# Altium PCB Smart_Podium.PcbDoc (part 1 of 3)
Units mm, origin at the board's own origin, x right, y up, seen from the top; angles counter-clockwise.
Board outline 100 x 100 mm, 4 copper layers (Top Layer, Inner Layer 1 (GND), Inner Layer 2 (GND), Bottom Layer), stack 1.57 mm thick; 107 components, 94 nets, 341 pads, 455 vias.
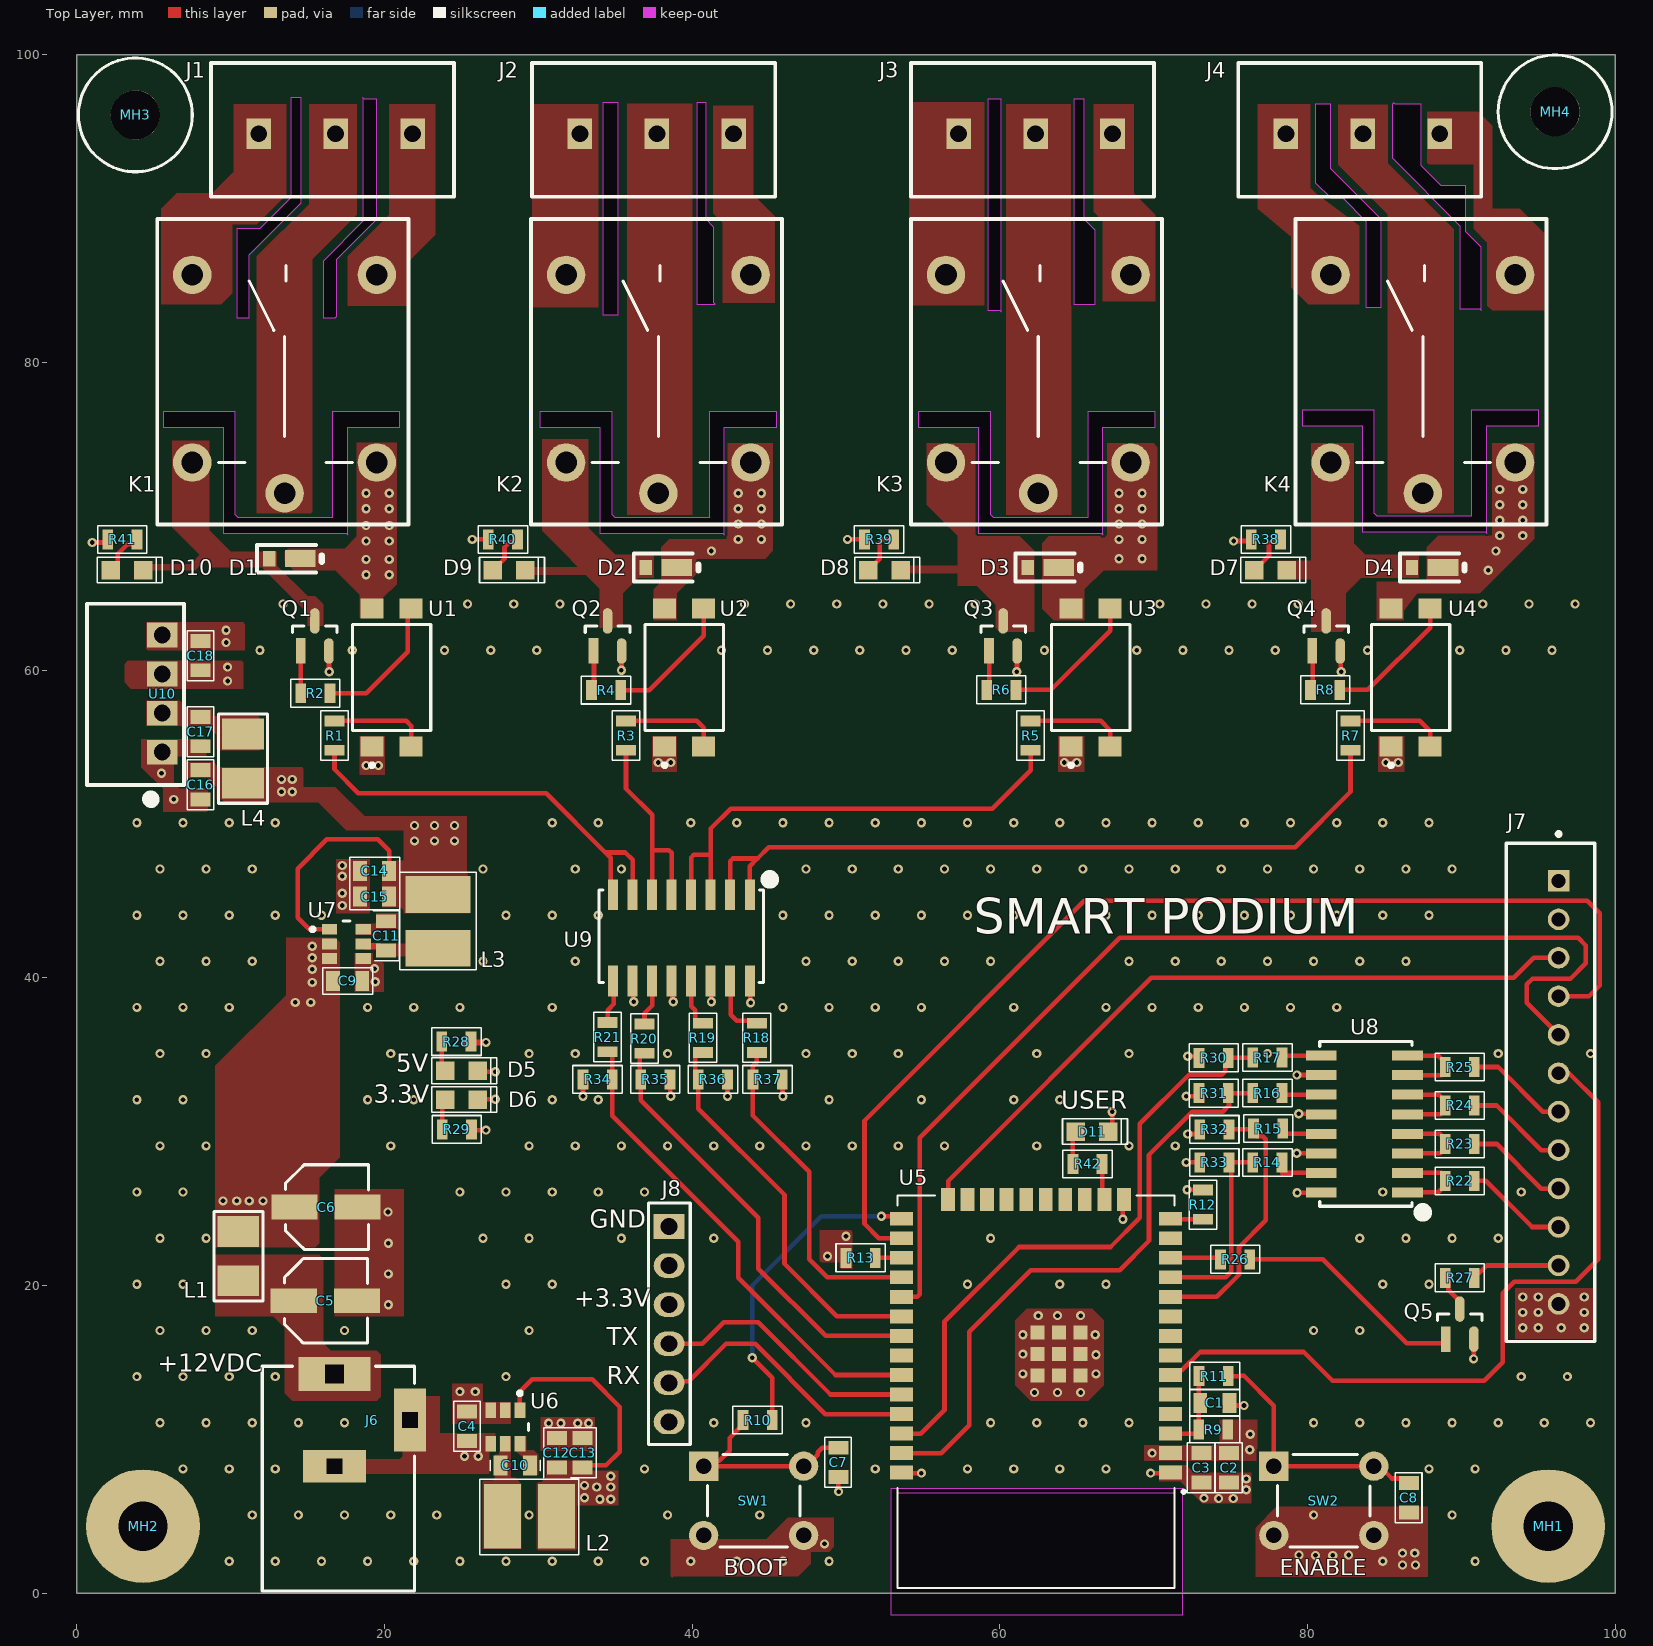
[diagram p0: Top Layer view]
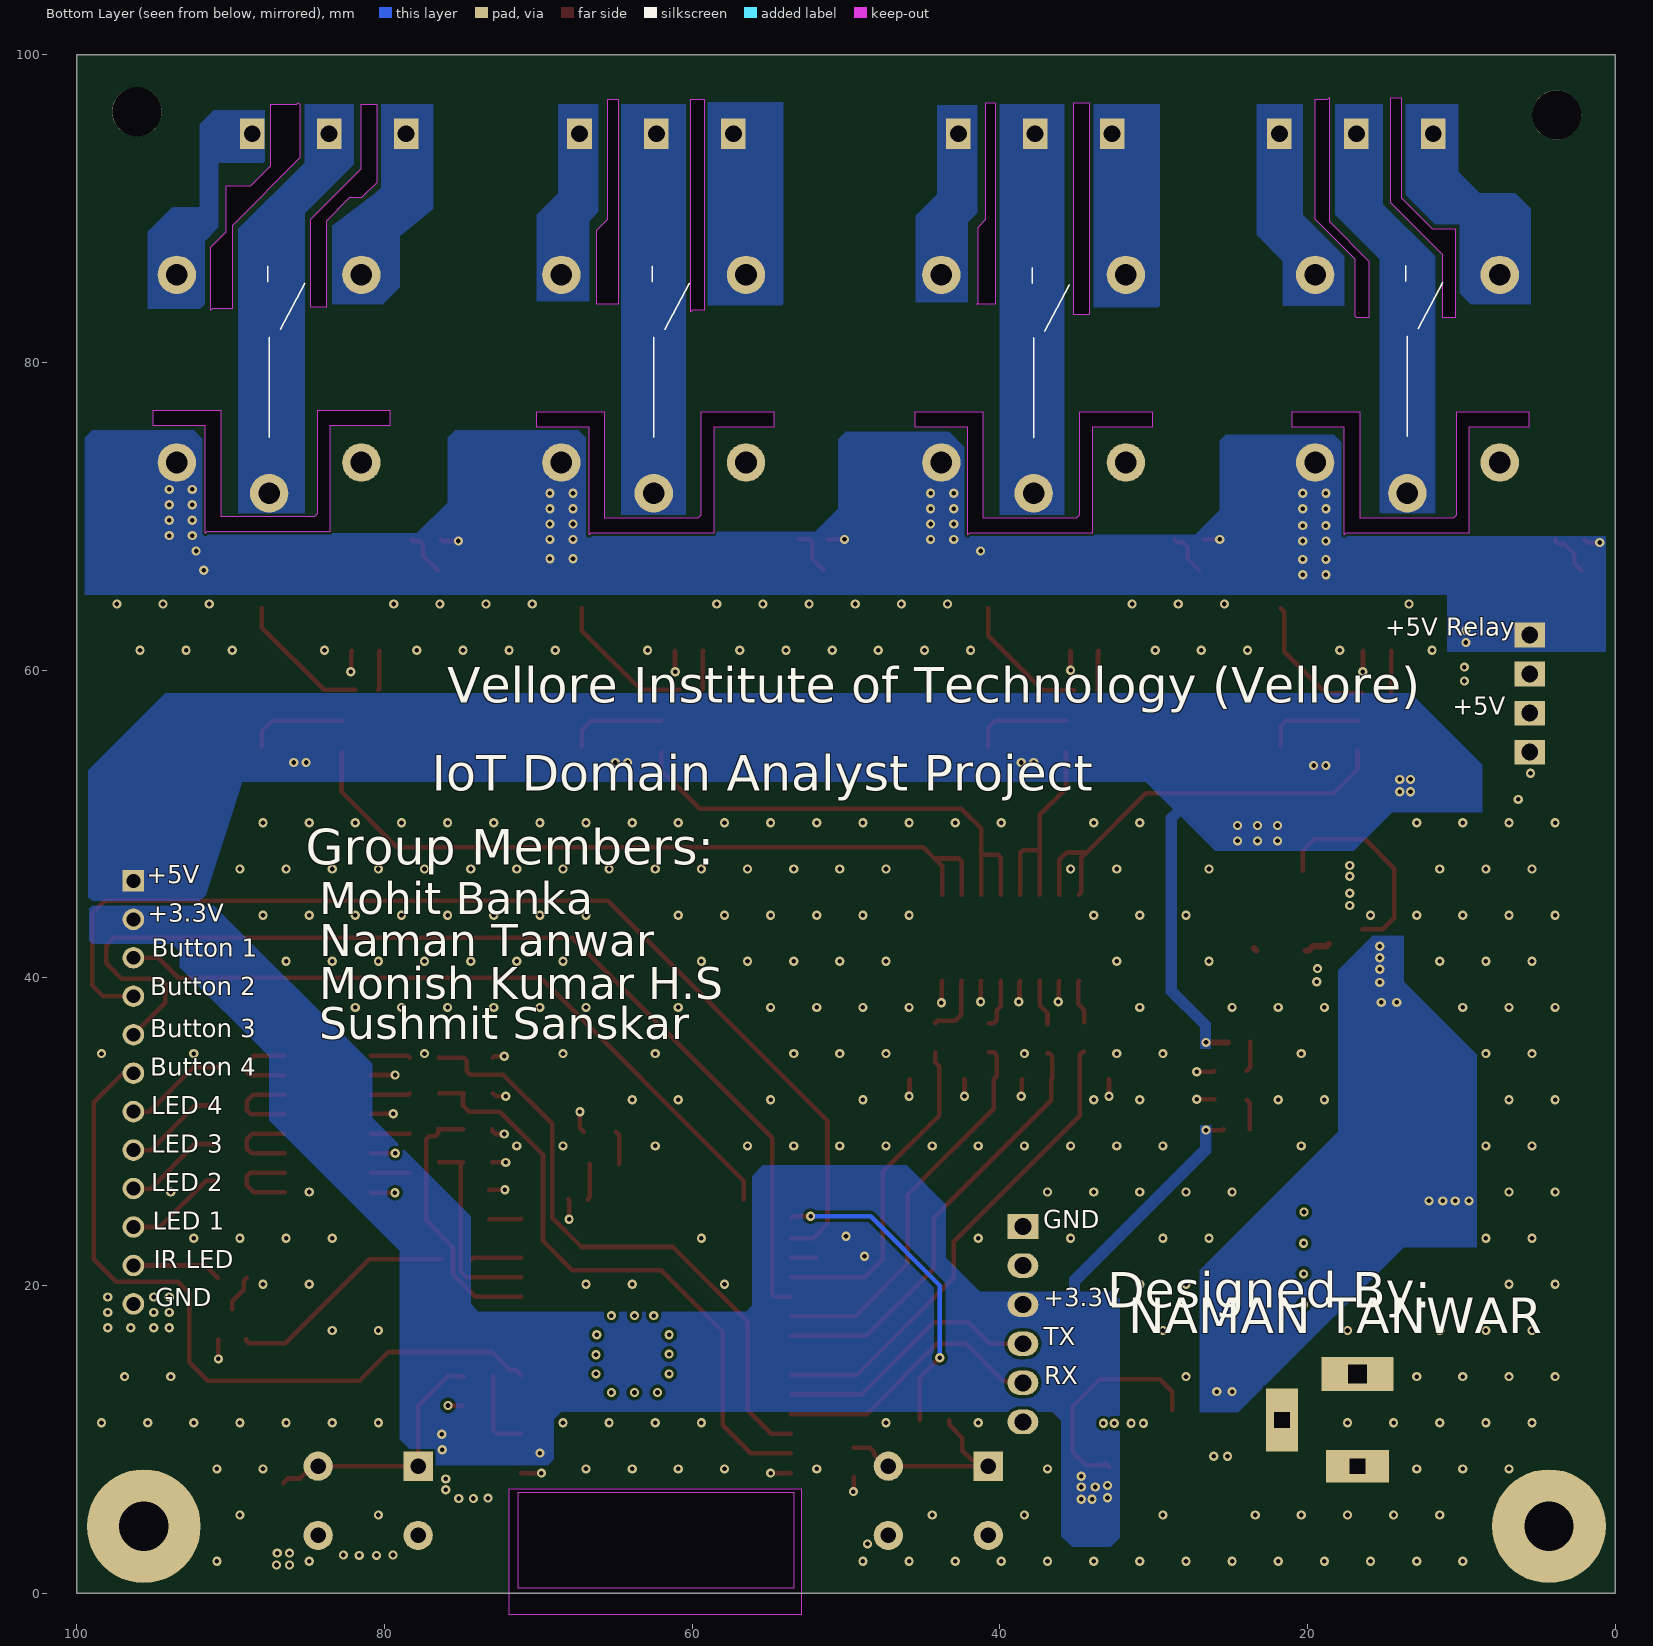
[diagram p1: Bottom Layer view, seen from below]
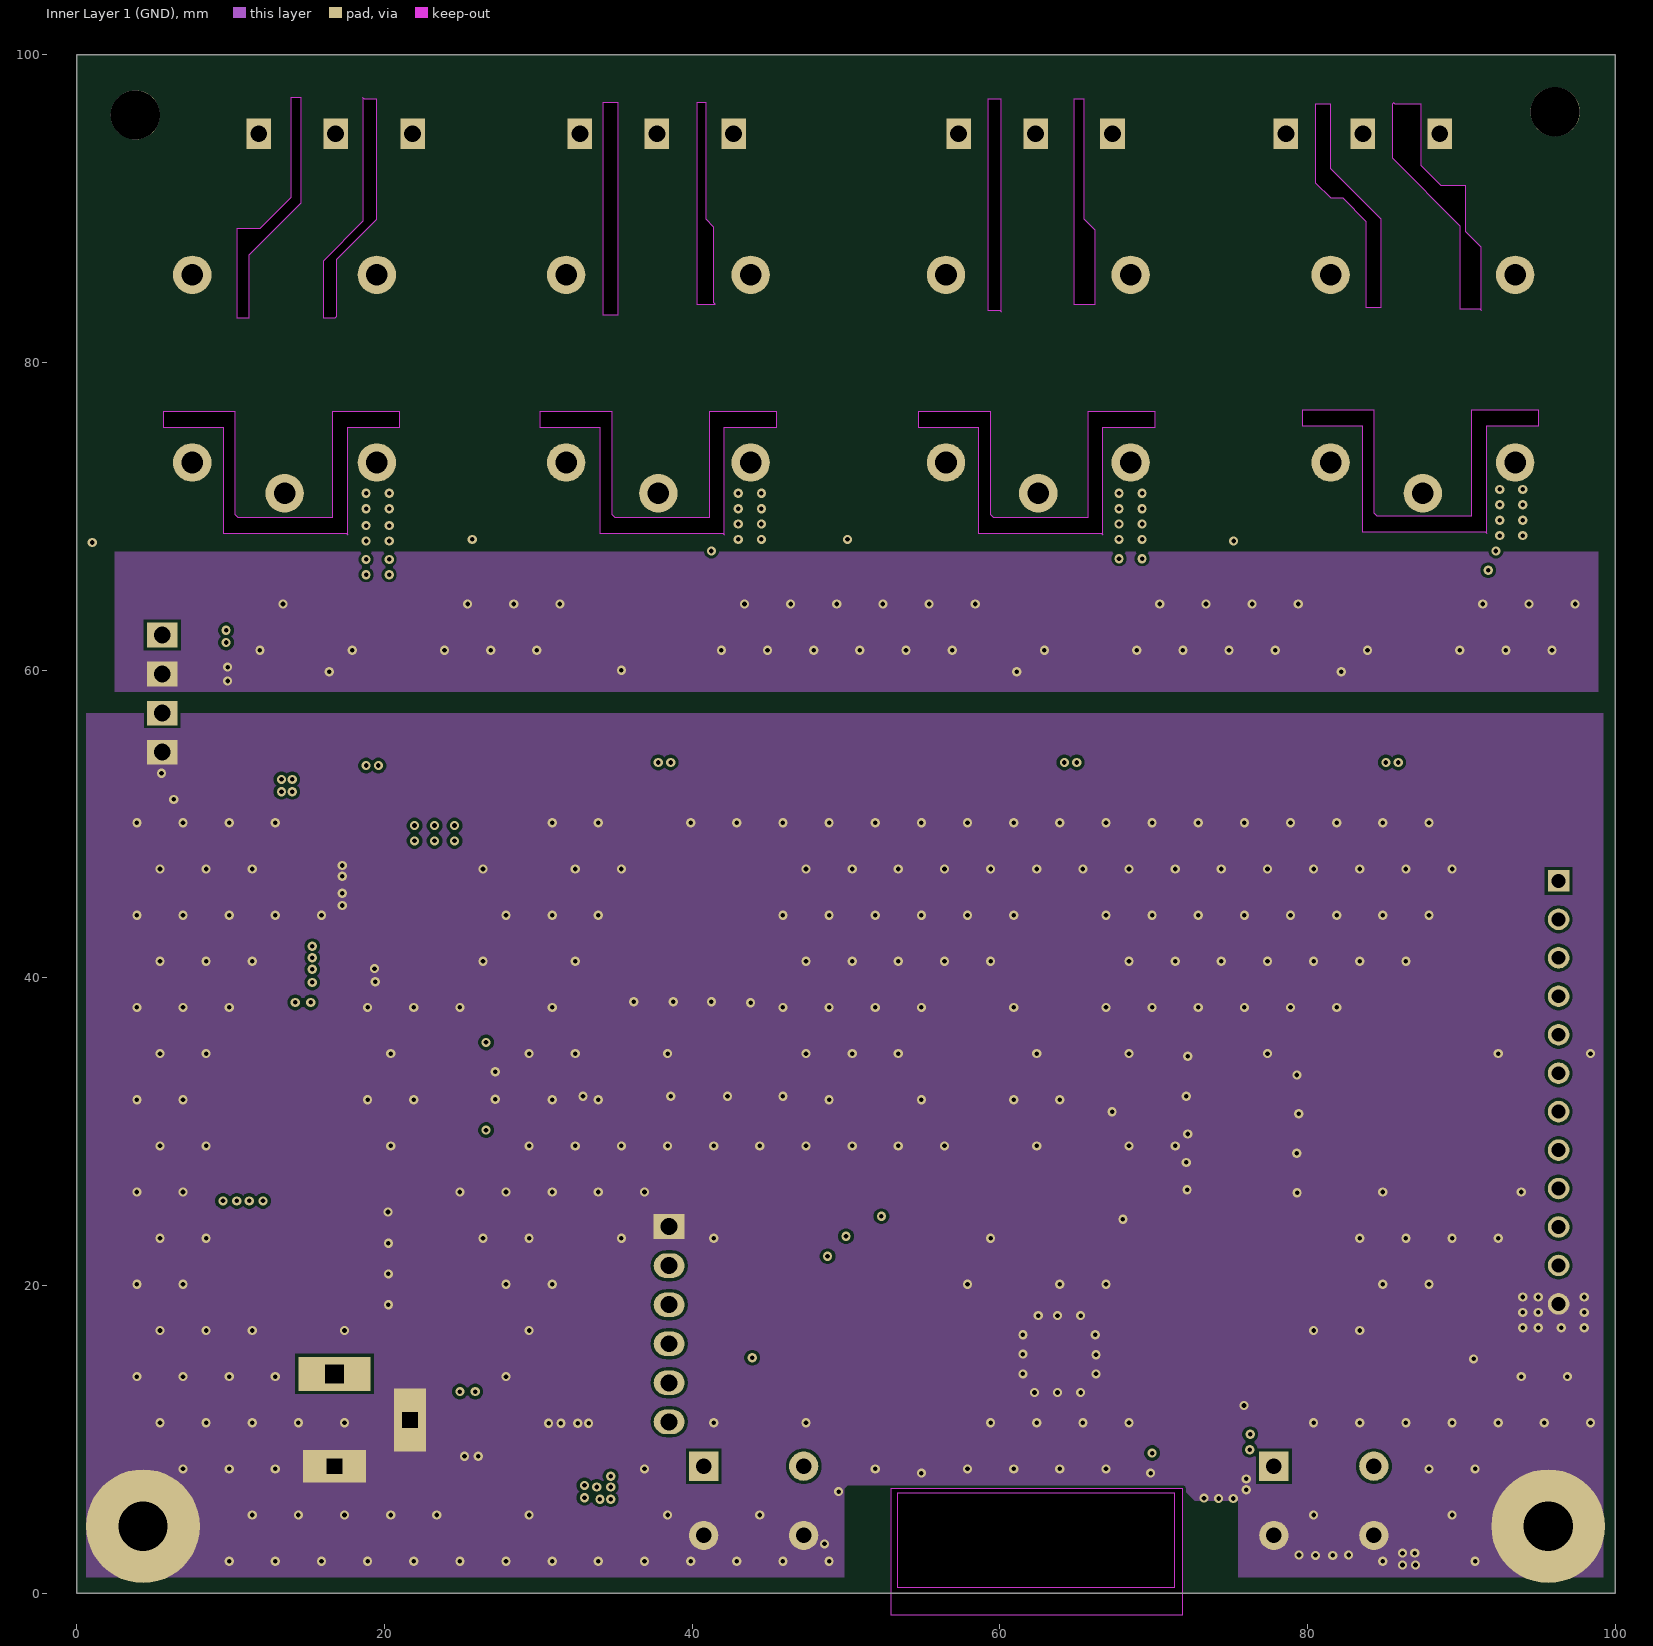
[diagram p2: Inner Layer 1 (GND)]
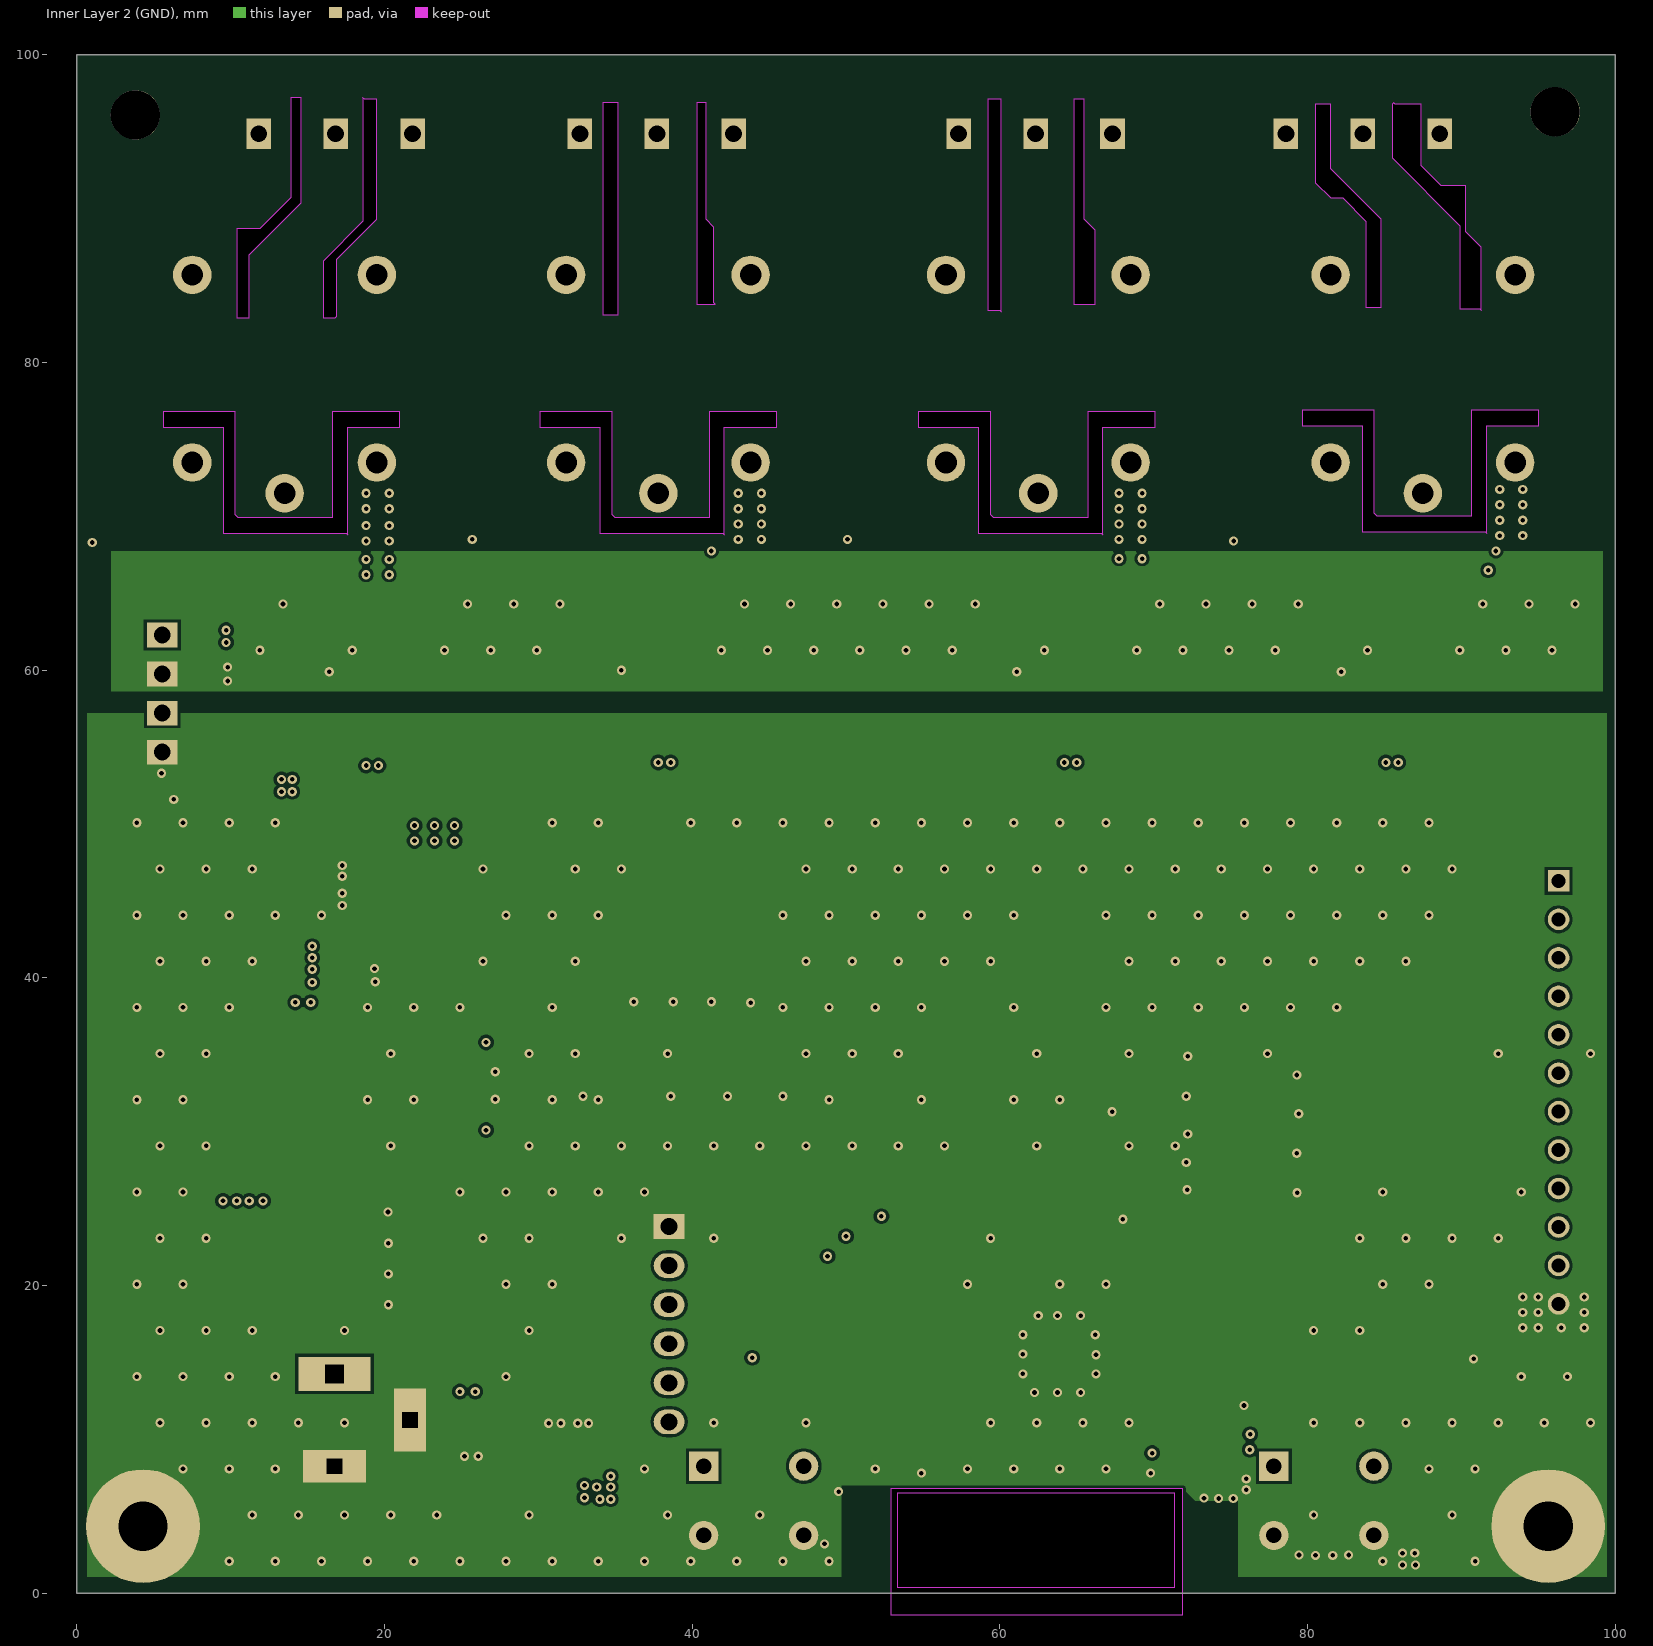
[diagram p3: Inner Layer 2 (GND)]
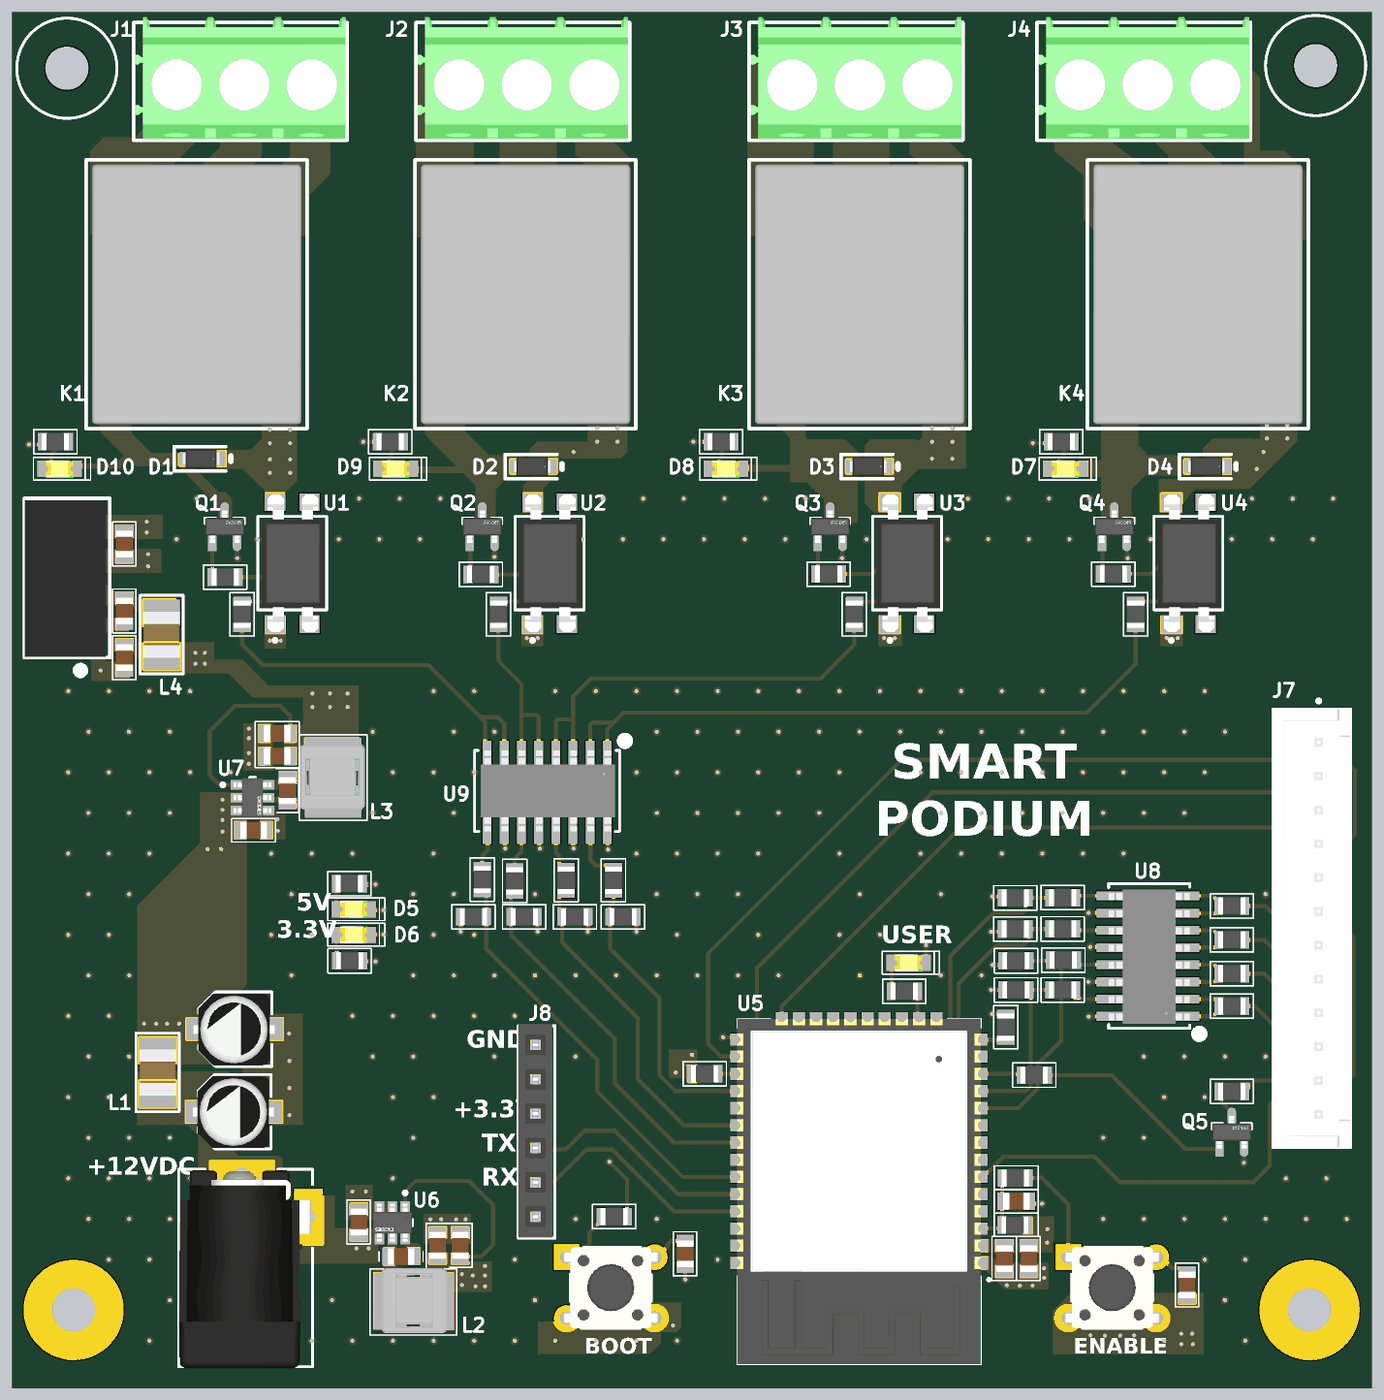
[diagram p5: 3D render of the assembled board from above, using the file's embedded part models]

## Layer stack, top to bottom
Top Solder: solder mask 0.0102, Solder Resist, Dk 3.5
Top Layer: signal copper 0.035
Dielectric 2: prepreg 0.2, PP-006, Dk 4.1
Inner Layer 1 (GND): signal copper 0.0175
Dielectric 1: dielectric 1.065, FR-4, Dk 4.8
Inner Layer 2 (GND): signal copper 0.0175
Dielectric 3: prepreg 0.2, PP-006, Dk 4.1
Bottom Layer: signal copper 0.035
Bottom Solder: solder mask 0.0102, Solder Resist, Dk 3.5

## Board outline
0,0 0,100 100,100 100,0
cut-out: 52.9,6.8 52.9,-1.4 71.9,-1.4 71.9,6.8
cut-out: 85.5,96.8 85.5,93.3 89.9,88.9 89.9,83.5 91.2,83.5 91.3,83.4 91.3,87.5 90.3,88.5 90.3,91.5 88.7,91.5 87.4,92.8 87.4,96.8 85.7,96.8 85.6,96.9
cut-out: 80.5,96.8 80.5,91.7 81.5,90.7 82.3,90.7 83.8,89.2 83.8,83.6 84.8,83.6 84.8,89.3 81.5,92.6 81.5,96.8
cut-out: 64.8,83.8 66.2,83.8 66.2,88.6 65.5,89.3 65.5,97.1 64.8,97.1
cut-out: 59.2,97.1 59.2,83.4 60,83.4 60.1,83.3 60.1,97.1
cut-out: 40.3,96.9 40.3,83.8 41.5,83.8 41.4,83.9 41.4,88.8 40.9,89.3 40.9,96.9 40.4,96.9
cut-out: 34.2,96.9 34.2,83.1 35.2,83.1 35.2,96.9
cut-out: 18.6,89.2 16,86.6 16,82.9 16.8,82.9 16.9,83 16.9,86.7 19.5,89.3 19.5,97.1 18.7,97.1 18.6,97.2
cut-out: 13.9,97.2 13.9,90.7 11.9,88.7 10.4,88.7 10.4,82.9 11.2,82.9 11.2,87 14.6,90.4 14.6,97.2
cut-out: 54.7,75.8 58.6,75.8 58.6,68.9 66.6,68.9 66.7,68.8 66.7,75.8 70.1,75.8 70.1,76.8 65.7,76.8 65.7,69.9 59.6,69.9 59.4,70.1 59.4,76.8 54.7,76.8
cut-out: 79.65,75.9 83.55,75.9 83.55,69 91.55,69 91.65,68.9 91.65,75.9 95.05,75.9 95.05,76.9 90.65,76.9 90.65,70 84.55,70 84.35,70.2 84.35,76.9 79.65,76.9
cut-out: 30.1,75.8 34,75.8 34,68.9 42,68.9 42.1,68.8 42.1,75.8 45.5,75.8 45.5,76.8 41.1,76.8 41.1,69.9 35,69.9 34.8,70.1 34.8,76.8 30.1,76.8
cut-out: 5.6,75.8 9.5,75.8 9.5,68.9 17.5,68.9 17.6,68.8 17.6,75.8 21,75.8 21,76.8 16.6,76.8 16.6,69.9 10.5,69.9 10.3,70.1 10.3,76.8 5.6,76.8

## Design rules (kind name [scope] priority, off if disabled: settings)
Clearance [All] p1: gap=0.2 ignorepadtopadclearanceinfootprint=TRUE
Clearance Pours [IsRegion] p2: gap=0.3 ignorepadtopadclearanceinfootprint=FALSE
HoleSize [All] p1: absolutevalues=TRUE maxlimit=10 minlimit=0.025 maxpercent=80.000 minpercent=20.000
MinimumSolderMaskSliver [All] p1: minsoldermaskwidth=0.2
PlaneConnect [All] p1: planeconnectstyle=Direct reliefexpansion=0.508 reliefentries=4 reliefconductorwidth=0.254 reliefairgap=0.254
PolygonConnect [All] p1: connectstyle=Direct reliefconductorwidth=0.254 reliefentries=4 polygonreliefangle="90 Angle" airgapwidth=0.254
RoutingVias [All] p1: holewidth=0.3 width=0.6 viastyle="Through Hole" minholewidth=0.3 minwidth=0.6 maxholewidth=0.3 maxwidth=0.6
SilkToSilkClearance [All] p1: silktosilkclearance=0
SilkToSolderMaskClearance [IsPad] p1: minsilkscreentomaskgap=0.15 clearancetoexposedcopper=TRUE
SolderMaskExpansion [All] p1: expansion=0.102 istentingtop=FALSE
Width WidthPower [InNet('+*') or InNet('GND')] p1: maxlimit=0.5 minlimit=0.3 preferedwidth=0.4
Width [All] p2: maxlimit=0.4 minlimit=0.3 preferedwidth=0.3
25 further rules are at their usual default settings.

## Components (designator, comment, footprint, x,y, rotation, side; value= is the part's Value field where it differs from the comment)
C1 "1u / 25V" C0805 73.975,12.375 r180 top
C2 "10u / 16V" C0805 74.9,8.15 r90 top
C3 "100n" C0805 73.1,8.15 r270 top
C4 "10u / 16V" C0805 25.375,10.85 r90 top
C5 "100u / 16V" C_ALU_C_SIZE 16.15,19 r0 top
C6 "100u / 16V" C_ALU_C_SIZE 16.2,25.1 r0 top
C7 "100n" C0805 49.5,8.5 r90 top
C8 "100n" C0805 86.595,6.2 r90 top
C9 "10u / 16V" C0805 17.6,39.8 r180 top
C10 "100n" C0805 28.5,8.3 r0 top
C11 "100n" C0805 20.1,42.725 r90 top
C12 "22u / 16V" C0805 31.2,9.125 r270 top
C13 "22u / 16V" C0805 32.875,9.125 r270 top
C14 "22u / 16V" C0805 19.35,46.95 r0 top
C15 "22u / 16V" C0805 19.35,45.275 r0 top
C16 "4.7u/25v" C0805 8.05,52.55 r90 top value=4.7uF
C17 "4.7u/25v" C0805 8.05,56 r90 top value=4.7uF
C18 "10u / 16V" C0805 8.05,60.95 r90 top
D1 "SS13HE" SOD323HE 13.719,67.25 r180 top
D2 "SS13HE" SOD323HE 38.2,66.675 r180 top
D3 "SS13HE" SOD323HE 63.025,66.675 r180 top
D4 "SS13HE" SOD323HE 88.019,66.675 r180 top
D5 "LED 0805 ORANGE" LED_0805 25,33.95 r180 top
D6 "LED 0805 ORANGE" LED_0805 25,32.075 r180 top
D7 "LED 0805 ORANGE" LED_0805 77.6,66.5 r180 top
D8 "LED 0805 ORANGE" LED_0805 52.5,66.5 r180 top
D9 "LED 0805 ORANGE" LED_0805 28.1,66.5 r180 top
D10 "LED 0805 ORANGE" LED_0805 3.25,66.5 r180 top
D11 "LED 0805 ORANGE" LED_0805 66,30 r180 top
J1 "1X3_5mm" SSCREW_CONN_5MM_1X3 14.325,94.875 r90 top locked
J2 "1X3_5mm" SSCREW_CONN_5MM_1X3 35.2,94.875 r90 top locked
J3 "1X3_5mm" SSCREW_CONN_5MM_1X3 59.825,94.875 r90 top locked
J4 "1X3_5mm" SSCREW_CONN_5MM_1X3 81.1,94.875 r90 top locked
J6 "4840.2201" DC_JACK 16.75,14.25 r0 top locked
J7 "JST CONN 1X12" FP-B12B-XH-A_LF_SN-MFG 96.325,46.3 r90 top
J8 "HEADER FEMALE 1X6 2.54mm" HEADER_FEMALE_1X6_2.54MM 38.5,23.83 r0 top
K1 "PR12-5V-360-1A" RELAY_SPST 13.5,78.6 r180 top locked
K2 "PR12-5V-360-1A" RELAY_SPST 37.8,78.6 r180 top locked
K3 "PR12-5V-360-1A" RELAY_SPST 62.5,78.6 r180 top locked
K4 "PR12-5V-360-1A" RELAY_SPST 87.5,78.6 r180 top locked
L1 "2u2 / 2A" C1210_IND 10.5,21.9 r90 top
L2 "3u9" 3U9_IND_NON_STANDARD 29.475,5 r0 top value=15uH
L3 "4u7" 4U7_IND_NON_STANDARD 23.475,43.725 r90 top value=4.7uH
L4 "6.8u / 1.4A" C1210_IND 10.8,54.25 r90 top
MH1 "MH_7.4MMC_3.2MMD" MH_7.4MMC_3.2MMD#1 95.65,4.35 r0 top
MH2 "MH_7.4MMC_3.2MMD" MH_7.4MMC_3.2MMD#2 4.3,4.2 r0 top
MH3 "MH_7.4MMNC_3.2MMD" MH_7.4MMC_3.2MMD_NON_COPPER_NPTH 3.8,96.1 r0 top
MH4 "MH_7.4MMNC_3.2MMD" MH_7.4MMC_3.2MMD_NON_COPPER_NPTH 96.1,96.3 r0 top
Q1 "MMBT3904-7-F" FP-SOT23-IPC_A 15.464,62.225 r90 top
Q2 "MMBT3904-7-F" FP-SOT23-IPC_A 34.5,62.225 r90 top
Q3 "MMBT3904-7-F" FP-SOT23-IPC_A 60.215,62.225 r90 top
Q4 "MMBT3904-7-F" FP-SOT23-IPC_A 81.215,62.225 r90 top
Q5 "MMBT3904-7-F" FP-SOT23-IPC_A 89.9,17.487 r90 top
R1 "120R 0805" R0805 16.75,55.75 r90 top value=120R
R2 "120R 0805" R0805 15.5,58.5 r180 top value=120R
R3 "120R 0805" R0805 35.7,55.75 r90 top value=120R
R4 "120R 0805" R0805 34.4,58.7 r180 top value=120R
R5 "120R 0805" R0805 62,55.75 r90 top value=120R
R6 "120R 0805" R0805 60.1,58.725 r180 top value=120R
R7 "120R 0805" R0805 82.8,55.75 r90 top value=120R
R8 "120R 0805" R0805 81.15,58.725 r180 top value=120R
R9 "10K" R0805 73.875,10.625 r180 top
R10 "22R" R0805 44.25,11.25 r0 top
R11 "22R" R0805 73.9,14.1 r180 top
R12 "10K" R0805 73.2,25.25 r90 top
R13 "10K" R0805 50.95,21.8 r180 top
R14 "1K" R0805 77.4,28 r0 top
R15 "1K" R0805 77.45,30.2 r0 top
R16 "1K" R0805 77.4,32.508 r0 top
R17 "1K" R0805 77.4,34.817 r0 top
R18 "1K" R0805 44.2,36.1 r90 top
R19 "1K" R0805 40.7,36.1 r90 top
R20 "1K" R0805 36.9,36.05 r90 top
R21 "1K" R0805 34.5,36.15 r90 top
R22 "220" R0805 89.9,26.8 r0 top
R23 "220" R0805 89.9,29.2 r0 top
R24 "220" R0805 89.9,31.7 r0 top
R25 "220" R0805 89.9,34.2 r0 top
R26 "1K" R0805 75.3,21.7 r0 top
R27 "220" R0805 89.9,20.5 r0 top
R28 "560R" R0805 24.675,35.85 r0 top
R29 "560R" R0805 24.7,30.15 r0 top
R30 "10K" R0805 73.9,34.8 r180 top
R31 "10K" R0805 73.9,32.5 r180 top
R32 "10K" R0805 73.95,30.15 r180 top
R33 "10K" R0805 73.95,28 r180 top
R34 "10K" R0805 33.85,33.4 r180 top
R35 "10K" R0805 37.6,33.4 r0 top
R36 "10K" R0805 41.35,33.4 r0 top
R37 "10K" R0805 44.9,33.4 r0 top
R38 "560R" R0805 77.3,68.5 r180 top
R39 "560R" R0805 52.15,68.5 r180 top
R40 "560R" R0805 27.7,68.5 r180 top
R41 "560R" R0805 2.95,68.5 r180 top
R42 "560R" R0805 65.7,27.9 r0 top
SW1 "1825910-6" 1825910-6 44,6 r90 top
SW2 "1825910-6" 1825910-6 81.064,6 r90 top
U1 "" LTST-LTV-817S-4_V 20.456,59.525 r90 top
U2 "" LTST-LTV-817S-4_V 39.479,59.525 r90 top
U3 "" LTST-LTV-817S-4_V 65.9,59.525 r90 top
U4 "" LTST-LTV-817S-4_V 86.7,59.525 r90 top
U5 "ESP32-WROOM-32E-H4" XCVR_ESP32-WROOM-32E_(4MB_HIGH_TEMP) 62.35,13.09 r180 top locked
U6 "AP63203WU-7" FP-TSOT26-MFG 27.85,10.799 r270 top
U7 "AP63205WU-7" FP-TSOT26-MFG 17.521,42.204 r0 top
U8 "MMPQ3904" 16SOIC 83.7,30.495 r180 top
U9 "MMPQ3904" 16SOIC 39.3,42.6 r270 top
U10 "DC-DC 5V-5V" "DC-DC ISOLATOR 1X4 PINS" 5.55,54.67 r180 top

## Footprints (in the part's own frame and the unit in brackets; to place one, negate y for a bottom-side part, rotate by r counter-clockwise, add the part's x,y. Pads: shape width x height; smd on the part's side, far side on the other; paste and mask are expansions set on the pad)
3U9_IND_NON_STANDARD [mm]
  rect 2.4x4.2 smd mask+0.05: 1(-1.8,0) 2(1.7,0)
  silkscreen extent -3.27,-2.5 3.15,2.4, body extent -2.41,-2.35 2.41,2.45, height 2.76
4U7_IND_NON_STANDARD [mm]
  rect 2.4x4.2 smd mask+0.05: 1(-1.8,0) 2(1.7,0)
  silkscreen extent -3.2,-2.5 3.13,2.5, body extent -2.41,-2.35 2.41,2.45, height 2.76
16SOIC [mm]
  rect 2x0.65 smd: 1(-2.8,4.445) 2(-2.8,3.175) 3(-2.8,1.905) 4(-2.8,0.635) 5(-2.8,-0.635) 6(-2.8,-1.905) 7(-2.8,-3.175) 8(-2.8,-4.445) 9(2.8,-4.445) 10(2.8,-3.175) 11(2.8,-1.905) 12(2.8,-0.635) 13(2.8,0.635) 14(2.8,1.905) 15(2.8,3.175) 16(2.8,4.445)
  silkscreen extent -3.9,-5.36 2.9,5.84, body extent -3.1,-4.91 2.9,5, height 1.76
1825910-6 [mm]
  rect 1.9x1.9 hole 1: 1(2.25,3.25)
  round 1.9 hole 1: 2(2.25,-3.25) 3(-2.25,3.25) 4(-2.25,-3.25)
  silkscreen extent -3,-3 3,3, body extent -3,-3.9 3,3.9, height 5.02
C0805 [mm]
  rect 0.9x1.3 smd mask+0.05: 1(-0.95,0) 2(0.95,0)
  silkscreen extent -1.63,-0.85 1.63,0.85, body extent -1,-0.63 1,0.63, height 1.46
C1210_IND [mm]
  rect 2x2.7 smd: 1(-1.6,0) 2(1.6,0)
  silkscreen extent -2.9,-1.6 2.9,1.6, body extent -1.7,-1.35 1.7,1.35, height 2.69
C_ALU_C_SIZE [mm]
  rect 3x1.6 smd: 1(-2.05,0) 2(2.05,0)
  silkscreen extent -2.65,-2.75 2.75,2.75, body extent -3.05,-2.68 2.95,2.62, height 5.81
"DC-DC ISOLATOR 1X4 PINS" [mm]
  rect 2x1.6 hole 1.1 mask+0.05: 1(0,0) 2(0,-2.54) 3(0,-5.08) 4(0,-7.62)
  silkscreen extent -1.43,-9.65 4.9,3.14, body extent -1.12,-9.53 4.88,2.07, height 10.16
DC_JACK [mm]
  rect 4.7x2.2 hole 1.2 square: 1(0,0)
  rect 4.1x2.1 hole 1 square: 2(0,-6)
  rect 2.1x4.1 hole 1 square: 3(4.9,-3)
  silkscreen extent -4.7,-14.1 5.2,0.5, body extent -4.67,-14.21 5.1,0.41, height 10.67
FP-B12B-XH-A_LF_SN-MFG [mm]
  rect 1.4x1.4 hole 0.9 paste-1000 mask+0: 1(0,0)
  round 1.4 hole 0.9 paste-1000 mask+0: 2(-2.5,0) 3(-5,0) 4(-7.5,0) 5(-10,0) 6(-12.5,0) 7(-15,0) 8(-17.5,0) 9(-20,0) 10(-22.5,0) 11(-25,0) 12(-27.5,0)
  silkscreen extent -29.95,-2.35 3.17,3.4, body extent -29.95,-2.35 2.45,3.4, height 7
FP-SOT23-IPC_A [mm]
  rect 1.659x0.627 smd paste+0 mask+0: 1(-0.977,0.915)
  rrect100% 1.659x0.627 smd paste+0 mask+0: 2(-0.977,-0.915) 3(0.977,0)
  silkscreen extent 0.23,-1.45 0.65,1.45, body extent -2.31,-1.95 2.31,1.95, height 0.25
FP-TSOT26-MFG [mm]
  rect 1x0.7 smd paste+0 mask+0: 1(-1.099,0.95) 2(-1.099,0) 3(-1.099,-0.95) 4(1.099,-0.95) 5(1.099,0) 6(1.099,0.95)
  silkscreen extent -2.32,0.83 0.22,1.5, body extent -1.4,-1.45 1.4,1.45, height 1
HEADER_FEMALE_1X6_2.54MM [mm]
  rect 2x1.6 hole 1.1 mask+0.05: 1(0,0)
  oval 2x1.6 hole 1.1 mask+0.05: 2(0,-2.54) 3(0,-5.08) 4(0,-7.62) 5(0,-10.16) 6(0,-12.7)
  silkscreen extent -1.35,-14.18 1.38,1.53, body extent -1.34,-14.11 1.2,1.63, height 8.52
LED_0805 [mm]
  rect 1.2x1.2 smd mask+0.05: 1(-1.05,0) 2(1.05,0)
  silkscreen extent -2.3,-0.85 1.92,0.82, body extent -1.01,-0.63 1.01,0.63, height 1.1
LTST-LTV-817S-4_V [mm] "SMD, 4-Leads, Body 7x5.1mm, Pitch 2.54mm"
  rect 1.3x1.5 smd: 1(-4.5,1.27) 2(-4.5,-1.27) 3(4.5,-1.27) 4(4.5,1.27)
  silkscreen extent -5.82,-2.55 3.45,2.55, body extent -5.08,-2.35 5.08,2.25, height 4.6
MH_7.4MMC_3.2MMD#1 [mm]
  round 7.4 hole 3.2: 1(0,0)
MH_7.4MMC_3.2MMD#2 [mm]
  round 7.4 hole 3.2: 1(0,0.15)
MH_7.4MMC_3.2MMD_NON_COPPER_NPTH [mm]
  round 3.2 hole 3.2 unplated: 1(0,0)
  silkscreen extent -3.7,-3.7 3.7,3.7
R0805 [mm]
  rect 0.7x1.3 smd mask+0.05: 1(-0.95,0) 2(0.95,0)
  silkscreen extent -1.6,-0.9 1.6,0.9, body extent -1,-0.63 1,0.63, height 0.61
RELAY_SPST [mm]
  round 2.5 hole 1.4: 1(-6,5.1) 2(0,7.1) 3(6,-7.1) 4(6,5.1) 5(-6,-7.1)
  silkscreen extent -8.05,-10.73 8.27,9.13, body extent -7.65,-10.4 7.85,8.8, height 14.71
SOD323HE [mm]
  rect 2x1.1 smd: 1(-0.8,0)
  rect 0.8x1 smd: 2(1.219,0)
  silkscreen extent -2.2,-0.9 2,0.9, body extent -1.35,-0.7 1.35,0.7, height 0.76
SSCREW_CONN_5MM_1X3 [mm]
  rect 2x1.6 hole 1.1: 1(0,2.5) 2(0,-2.5) 3(0,-7.5)
  silkscreen extent -4.1,-10.2 4.6,5.6, body extent -4,-10.09 5,5.48, height 11.41
XCVR_ESP32-WROOM-32E_(4MB_HIGH_TEMP) [mm]
  rect 1.5x0.9 smd mask+0.05: 1(-8.75,5.26) 2(-8.75,3.99) 3(-8.75,2.72) 4(-8.75,1.45) 5(-8.75,0.18) 6(-8.75,-1.09) 7(-8.75,-2.36) 8(-8.75,-3.63) 9(-8.75,-4.9) 10(-8.75,-6.17) 11(-8.75,-7.44) 12(-8.75,-8.71) 13(-8.75,-9.98) 14(-8.75,-11.25) 25(8.75,-11.25) 26(8.75,-9.98) 27(8.75,-8.71) 28(8.75,-7.44) 29(8.75,-6.17) 30(8.75,-4.9) 31(8.75,-3.63) 32(8.75,-2.36) 33(8.75,-1.09) 34(8.75,0.18) 35(8.75,1.45) 36(8.75,2.72) 37(8.75,3.99) 38(8.75,5.26)
  rect 0.9x1.5 smd mask+0.05: 15(-5.715,-12.5) 16(-4.445,-12.5) 17(-3.175,-12.5) 18(-1.905,-12.5) 19(-0.635,-12.5) 20(0.635,-12.5) 21(1.905,-12.5) 22(3.175,-12.5) 23(4.445,-12.5) 24(5.715,-12.5)
  rect 0.9x0.9 smd mask+0.05: 39_1(-2.9,-1.06) 39_2(-1.5,-1.06) 39_3(-0.1,-1.06) 39_4(-2.9,-2.46) 39_5(-1.5,-2.46) 39_6(-0.1,-2.46) 39_7(-2.9,-3.86) 39_8(-1.5,-3.86) 39_9(-0.1,-3.86)
  Keep-Out Layer region: 9,6.56 -9,6.56 -9,12.75 9,12.75
  silkscreen extent -9.7,-12.75 9,12.75, body extent -9,-12.75 9,12.75, height 3.25

## Part data
C1: library part C2012X5R1E105K125AA, "CAP CER 1UF 25V X5R 0805", Capacitance=1uF, Case Code (Imperial)=0805, Case Code (Metric)=2012, Dielectric=X5R, Dielectric Material=Ceramic, Manufacturer=TDK, Max Operating Temperature=85°C, Min Operating Temperature=-55°C, Package Quantity=2000, Supplier Part Number 1=445-1419-1-ND, Tolerance=10%, Voltage=25V, Case/Package=0805, Category="Ceramic Capacitors", ComponentLink1Description=https://datasheet.ciiva.com/11787/0900766b80c1bb00-11787608.pdf?src-supplier=RSComponents, ComponentLink1URL=https://datasheet.ciiva.com/11787/0900766b80c1bb00-11787608.pdf?src-supplier=RSComponents, ComponentLink2Description=https://datasheet.ciiva.com/16449/e412-c-16449595.pdf?src-supplier=Future+Electronics, ComponentLink2URL=https://datasheet.ciiva.com/16449/e412-c-16449595.pdf?src-supplier=Future+Electronics, ComponentLink3Description=https://datasheet.ciiva.com/28602/1744655-28602171.pdf?src-supplier=Element14, ComponentLink3URL=https://datasheet.ciiva.com/28602/1744655-28602171.pdf?src-supplier=Element14, ComponentLink4Description=https://datasheet.ciiva.com/15192/getdatasheetpartid-726707-15192140.pdf?src-supplier=Verical, ComponentLink4URL=https://datasheet.ciiva.com/15192/getdatasheetpartid-726707-15192140.pdf?src-supplier=Verical, Construction=Flat, Depth=1.25mm, Height=1.25mm, Lead Free="Lead Free", Length=2mm, Manufacturer Part Number=C2012X5R1E105K125AA, Mount="Surface Mount", Number of Pins=2, Packaging="Tape and Reel", Pricing 1="1=0.21000, 10=0.14500, 50=0.08720, 100=0.07370, 500=0.05042, 1000=0.04460 (USD)", Radiation Hardening=No, Reach SVHC Compliant=Yes, Resistor Type=Ceramic, RoHS=Yes, RoHS Compliant=Yes, Series=C, Stock 1=84647, Supplier 1=Digi-Key, Termination=SMD/SMT, Thickness=0.057inch, Voltage Rating=25V, Voltage Rating (DC)=25V, Weight=0.000194oz, Width=0.049inch
C2 C4 C9 C18: library part CGA4J1X5R1C106M125AC, "Cap Ceramic 10uF 16V X5R 20% SMD 0805 85°C Blister Plastic T/R", Capacitance=10uF, Case Code (Imperial)=0805, Case Code (Metric)=2012, Dielectric=X5R, Manufacturer=TDK, Max Operating Temperature=85°C, Min Operating Temperature=-55°C, Package Quantity=2000, Ratings=AEC-Q200, Supplier Part Number 1=445-12654-1-ND, Tolerance=20%, Voltage Rating=16V, Case/Package=0805, Category="Ceramic Capacitors", ComponentLink1Description=https://product.tdk.com/info/en/catalog/datasheets/mlcc_automotive_general_en.pdf?src-supplier=Digi-Key, ComponentLink1URL=https://product.tdk.com/info/en/catalog/datasheets/mlcc_automotive_general_en.pdf?src-supplier=Digi-Key, ComponentLink2Description=https://product.tdk.com/info/en/documents/chara_sheet/CGA4J1X5R1C106M125AC.pdf?src-supplier=Digi-Key, ComponentLink2URL=https://product.tdk.com/info/en/documents/chara_sheet/CGA4J1X5R1C106M125AC.pdf?src-supplier=Digi-Key, ComponentLink3Description=http://product.tdk.com/capacitor/mlcc/detailed_information.php?lang=en&ref=jp&part_no=CGA4J1X5R1C106M125AC&src-supplier=Mouser, ComponentLink3URL=http://product.tdk.com/capacitor/mlcc/detailed_information.php?lang=en&ref=jp&part_no=CGA4J1X5R1C106M125AC&src-supplier=Mouser, ComponentLink4Description=http://product.tdk.com/en/catalog/datasheets/mlcc_automotive_general_en.pdf?src-supplier=Avnet, ComponentLink4URL=http://product.tdk.com/en/catalog/datasheets/mlcc_automotive_general_en.pdf?src-supplier=Avnet, Height=1.25mm, Lead Free="Lead Free", Length=0.079inch, Manufacturer Part Number=CGA4J1X5R1C106M125AC, Mount="Surface Mount", Packaging="Tape and Reel", Pricing 1="1=0.44000, 10=0.30300, 50=0.21200, 100=0.18180, 500=0.13636, 1000=0.11514 (USD)", RoHS=Yes, RoHS Compliant=Yes, Series=CGA, Stock 1=291153, Supplier 1=Digi-Key, Termination=SMD/SMT, Thickness=0.057inch, Voltage Rating (DC)=16V, Weight=0.000194oz, Width=0.049inch
C3 C7 C8 C10 C11: library part C2012X7R1H104M085AA, "C Series 0805 0.1 uF 50 V ±20 % Tolerance X7R SMT Multilayer Ceramic Capacitor", Capacitance=100nF, Case Code (Imperial)=0805, Case Code (Metric)=2012, Dielectric=X7R, Dielectric Material=Ceramic, Manufacturer=TDK, Max Operating Temperature=125°C, Min Operating Temperature=-55°C, Package Quantity=1, Supplier Part Number 1=445-7535-1-ND, Tolerance=20%, Voltage Rating=50V, Case/Package=0805, Category="Ceramic Capacitors", ComponentLink1Description=https://datasheet.ciiva.com/6256/tdkmlcccaprange-6256917.pdf?src-supplier=Digi-Key, ComponentLink1URL=https://datasheet.ciiva.com/6256/tdkmlcccaprange-6256917.pdf?src-supplier=Digi-Key, ComponentLink2Description=https://datasheet.ciiva.com/6256/tdkmlcccaprange-6256919.pdf?src-supplier=Digi-Key, ComponentLink2URL=https://datasheet.ciiva.com/6256/tdkmlcccaprange-6256919.pdf?src-supplier=Digi-Key, Construction=Flat, Depth=1.25mm, Height=0.85mm, Lead Free="Lead Free", Length=2mm, Manufacturer Part Number=C2012X7R1H104M085AA, Mount="Surface Mount", Number of Pins=2, Packaging="Tape and Reel", Pricing 1="1=0.13000, 10=0.09500, 50=0.05400, 100=0.04480, 500=0.03142, 1000=0.02601 (USD)", Resistor Type=Ceramic, RoHS=Yes, RoHS Compliant=Yes, Series=C, Stock 1=3401, Supplier 1=Digi-Key, Termination=SMD/SMT, Thickness=0.037inch, Voltage Rating (DC)=50V, Weight=0.000194oz, Width=0.049inch
C5 C6: library part EEE-FN1C101UR, "Cap Aluminum 100uF 16V 20% Cylindrical 0.7 Ohm 160mA 2000 hr 105°C Emboss T/R", Manufacturer=Panasonic, Supplier Part Number 1=10-EEE-FN1C101URCT-ND, Category=Capacitors, Manufacturer Part Number=EEE-FN1C101UR, Pricing 1="1=0.55000, 10=0.38600, 50=0.29220, 100=0.25450, 500=0.18850 (USD)", RoHS=No, Stock 1=1049, Supplier 1=Digi-Key
C12 C13 C14 C15: library part CL31A226MOCLNNC, "Cap Ceramic 22uF 16V X5R 20% SMD 1206 85°C Cardboard T/R", Capacitance=22uF, Case Code (Imperial)=1206, Case Code (Metric)=3216, Dielectric=X5R, Manufacturer=Samsung, Max Operating Temperature=85°C, Min Operating Temperature=-55°C, Package Quantity=1, Supplier Part Number 1=1276-2728-1-ND, Tolerance=20%, Voltage=16V, Case/Package=1206, Category="Ceramic Capacitors", ComponentLink1Description=https://datasheet.ciiva.com/25793/cl31a226moclnnc-25793126.pdf?src-supplier=Digi-Key, ComponentLink1URL=https://datasheet.ciiva.com/25793/cl31a226moclnnc-25793126.pdf?src-supplier=Digi-Key, ComponentLink2Description=https://datasheet.ciiva.com/26838/getdatasheetpartid-353197-26838865.pdf?src-supplier=Verical, ComponentLink2URL=https://datasheet.ciiva.com/26838/getdatasheetpartid-353197-26838865.pdf?src-supplier=Verical, Construction=Flat, Depth=1.6mm, Height=0.85mm, Lead Free="Lead Free", Length=3.2mm, Manufacturer Part Number=CL31A226MOCLNNC, Mount="Surface Mount", Packaging="Tape and Reel", Pricing 1="1=0.23000, 10=0.16000, 50=0.10640, 100=0.09040, 500=0.06382, 1000=0.05585 (USD)", Radiation Hardening=No, RoHS=Yes, RoHS Compliant=Yes, Series=CL, Stock 1=605129, Supplier 1=Digi-Key, Thickness=0.037inch, Voltage Rating=16V, Width=0.063inch
C16 C17: library part TMK212ABJ475KG-T, "Multilayer Ceramic Capacitors (High dielectric type), 25V, 4.7 uF, ± 10 %, 0805, X5R, RoHS", Case/Package=Ceramic, Dielectric=X5R, Manufacturer="Taiyo Yuden", Max Operating Temperature=85°C, Min Operating Temperature=-55°C, Supplier Part Number 1=587-5478-1-ND, Tolerance=10%, Category="Ceramic Capacitors", ComponentLink1Description=http://www.farnell.com/datasheets/2819920.pdf?src-supplier=Farnell, ComponentLink1URL=http://www.farnell.com/datasheets/2819920.pdf?src-supplier=Farnell, ComponentLink2Description=http://www.farnell.com/datasheets/2819920.pdf?src-supplier=Newark, ComponentLink2URL=http://www.farnell.com/datasheets/2819920.pdf?src-supplier=Newark, ComponentLink3Description=https://ds.yuden.co.jp/TYCOMPAS/ut/detail?pn=TMK212ABJ475KG-T&amp;u=M&src-supplier=Digi-Key, ComponentLink3URL=https://ds.yuden.co.jp/TYCOMPAS/ut/detail?pn=TMK212ABJ475KG-T&amp;u=M&src-supplier=Digi-Key, Contact Plating=Tin, Length=2mm, Manufacturer Part Number=TMK212ABJ475KG-T, Mounting Technology="Surface Mount", Pricing 1="1=0.17000, 10=0.11800, 50=0.06680, 100=0.05540, 500=0.03882, 1000=0.03213 (USD)", RoHS=Yes, RoHS Compliant=Yes, Stock 1=38178, Supplier 1=Digi-Key, Termination=Wraparound
D1 D2 D3 D4: "SS13HE Series 30 V 1 A Surface Mount Schottky Barrier Rectifier - SOD-323HE", Average Rectified Current=1A, Case/Package=SMD/SMT, Manufacturer="ON Semiconductor / Fairchild", Max Forward Surge Current (Ifsm)=25A, Max Repetitive Reverse Voltage (Vrrm)=30V, Supplier Part Number 1=SS13HECT-ND, Category="Schottky Diodes", ComponentLink1Description=https://www.fairchildsemi.com/datasheets/SS/SS13HE.pdf?src-supplier=Digi-Key, ComponentLink1URL=https://www.fairchildsemi.com/datasheets/SS/SS13HE.pdf?src-supplier=Digi-Key, Element Configuration=Single, Manufacturer Part Number=SS13HE, Max Reverse Voltage (DC)=30V, Mounting Technology="Surface Mount", Packaging="Tape and Reel", Pricing 1="1=0.42000, 10=0.34100, 100=0.23240, 500=0.17426, 1000=0.13070 (USD)", Reverse Recovery Time=5.6ns, RoHS=No, RoHS Compliant=No, Stock 1=1894, Supplier 1=Digi-Key, Weight=0.006g
D5 D6 D7 D8 D9 D10 D11: library part LOR976-PS-1, "Orange LED 0805 Vf = 2V, 20mA", Case Code (Imperial)=0805, Case Code (Metric)=2012, Color=Orange, Forward Current=25mA, Forward Voltage=2V, Lens Color=White, Manufacturer="Osram Opto", Max Operating Temperature=85°C, Min Operating Temperature=-30°C, Package Quantity=16000, Reverse Voltage=12V, Supplier Part Number 1="LO R976-PS-1", Test Current=20mA, Case/Package=0805, Category=LEDs, ComponentLink1Description=https://datasheet.ciiva.com/2119/00078881-0-2119287.pdf?src-supplier=Digi-Key, ComponentLink1URL=https://datasheet.ciiva.com/2119/00078881-0-2119287.pdf?src-supplier=Digi-Key, ComponentLink2Description=https://datasheet.ciiva.com/2119/00078881-0-2119286.pdf?src-supplier=Digi-Key, ComponentLink2URL=https://datasheet.ciiva.com/2119/00078881-0-2119286.pdf?src-supplier=Digi-Key, ComponentLink3Description=https://datasheet.ciiva.com/2119/00078881-0-2119288.pdf?src-supplier=Digi-Key, ComponentLink3URL=https://datasheet.ciiva.com/2119/00078881-0-2119288.pdf?src-supplier=Digi-Key, Contact Plating=Tin,Matte, Dominant Wavelength=606nm, Height=0.9mm, Illumination Color=Orange, Length=2mm, Lens Size=1.25mm, Lens Style=Flat,Rectangular,Diffused,Colorless, Lens Transparency=Diffused, Luminous Flux=0.735lm, Luminous Intensity=162.5mcd, Manufacturer Part Number=LOR976-PS-1, Mount="Surface Mount", Number of LEDs=1, Number of Pins=2, Packaging="Tape and Reel", Pricing 1="1=0.27100, 10=0.15400, 25=0.15270, 100=0.07290, 250=0.07210, 500=0.06600, 1000=0.05150 (USD)", Radiation Hardening=No, RoHS=Yes, RoHS Compliant=Yes, Series="CHIPLED 0805", Stock 1=2418, Supplier 1="Arrow Electronics", Viewing Angle=160°, Width=1.25mm
J1 J2 J3 J4: library part 1935174, "Terminal Block Header 3 Position Top Screw 0.197\" (5.00mm) PC Pins", Color=Green, Current=18A, Current Rating=17.5A, Flammability Rating="UL94 V-0", Manufacturer="Phoenix Contact", Max Current Rating=16A, Max Supply Voltage=250V, Package Quantity=250, Supplier Part Number 1=277-1578-ND, Voltage=300V, Voltage Rating (DC)=320V, Approvals=UL,VDE,CB,EAC, Category="Terminal Blocks", ComponentLink1Description=https://datasheet.ciiva.com/16047/1935174-16047249.pdf?src-supplier=Onlinecomponents.com, ComponentLink1URL=https://datasheet.ciiva.com/16047/1935174-16047249.pdf?src-supplier=Onlinecomponents.com, ComponentLink2Description=https://datasheet.ciiva.com/15169/getdatasheetpartid-212213-15169949.pdf?src-supplier=Verical, ComponentLink2URL=https://datasheet.ciiva.com/15169/getdatasheetpartid-212213-15169949.pdf?src-supplier=Verical, ComponentLink3Description=https://datasheet.ciiva.com/823/combiconcompact5-0mmseries-823761.pdf?src-supplier=Digi-Key, ComponentLink3URL=https://datasheet.ciiva.com/823/combiconcompact5-0mmseries-823761.pdf?src-supplier=Digi-Key, ComponentLink4Description=https://datasheet.ciiva.com/29218/744167-da-01-en-printklemme-pt-1-5-3-5-0-h-29218252.pdf?src-supplier=Conrad, ComponentLink4URL=https://datasheet.ciiva.com/29218/744167-da-01-en-printklemme-pt-1-5-3-5-0-h-29218252.pdf?src-supplier=Conrad, Contact Material=Copper,Tin, Depth=9mm, Height=11.3mm, Housing Color=Green, Housing Material=Polyamide, Insulation Material=Nylon, Lead Free="Lead Free", Length=9mm, Manufacturer Part Number=1935174, Material=Nylon, Mount="Through Hole", Number of Circuits=3, Number of Contacts=3, Number of Levels=1, Number of Pins=3, Number of Poles=3, Number of Positions=3, Number of Positions Per Level=3, Number of Rows=1, Number of Ways=3, Orientation=Straight, Packaging=Bulk, Pitch=5mm, Pricing 1="1=0.75000, 10=0.65600, 50=0.62700, 100=0.60990, 250=0.57000, 500=0.52440, 1000=0.51000 (USD)", Radiation Hardening=No, RoHS=Yes, RoHS Compliant=Yes, Series="COMBICON PT", Stock 1=144266, Stripping Length=5mm, Supplier 1=Digi-Key, Termination=Solder, Voltage Rating=250V, Weight=0.100531oz, Width=15mm, Wire Gauge (Max)=26AWG, Wire Gauge (Min)=12AWG, Wire/Cable Gauge=26AWG
J6: "DC Connector Socket 6x2mm 2-Pole 12VDC 0.5A 500VDC Dielectric Solder Term PCB Mt", Color=Black, Current Rating=500mA, Manufacturer=Schurter, Package Quantity=500, Supplier Part Number 1=486-3381-ND, Voltage Rating=12V, Category=Connectors, ComponentLink1Description=https://datasheet.ciiva.com/26837/getdatasheetpartid-572408-26837414.pdf?src-supplier=Verical, ComponentLink1URL=https://datasheet.ciiva.com/26837/getdatasheetpartid-572408-26837414.pdf?src-supplier=Verical, ComponentLink2Description=https://datasheet.ciiva.com/16318/typ-4840-1200-16318967.pdf?src-supplier=Future+Electronics, ComponentLink2URL=https://datasheet.ciiva.com/16318/typ-4840-1200-16318967.pdf?src-supplier=Future+Electronics, ComponentLink3Description=https://datasheet.ciiva.com/12342/typ-4840-2201-65401-12342879.pdf?src-supplier=Mouser, ComponentLink3URL=https://datasheet.ciiva.com/12342/typ-4840-2201-65401-12342879.pdf?src-supplier=Mouser, ComponentLink4Description=https://datasheet.ciiva.com/391/typ-4840-2201-391834.pdf?src-supplier=Digi-Key, ComponentLink4URL=https://datasheet.ciiva.com/391/typ-4840-2201-391834.pdf?src-supplier=Digi-Key, Connector Type=Jack, Contact Material="Copper Alloy", Contact Plating=Tin, Depth=14.5mm, Gender=Male, Housing Color=Black, Housing Material=PC, Lead Free="Lead Free", Length=9mm, Manufacturer Part Number=4840.2201, Mounting Technology="Through Hole", Number of Contacts=3, Number of Ports=1, Number of Terminals/Pins=3, Orientation="Right Angle", Pin Diameter=2mm, Pricing 1="1=1.82000, 50=1.67900, 100=1.41120 (USD)", Radiation Hardening=No, RoHS=Yes, RoHS Compliant=Yes, Series=4840, Shielding=Unshielded, Stock 1=9153, Supplier 1=Digi-Key, Termination=Solder, Weight=0.007125oz, Width=9mm
J7: library part B12B-XH-A(LF)(SN), "CONN HEADER VERT 12POS 2.5MM", Flammability Rating="UL94 V-0", Insulation Color=Natural, Max Operating Temperature=85°C, Min Operating Temperature=-25°C, Voltage Rating=250V, Connector Type=Header, Contact Finish - Mating=TIN, Contact Material=Brass, Contact Shape=Square, Contact Type="Male Pin", Fastening Type=Detent, Height=0.5inch, Insulation Material=Nylon, Length=1.5inch, Manufacturer Part Number=B12B-XH-A(LF)(SN), Mated Stacking Heights=9.8mm, Mount="Through Hole", Number of Positions=12, Number of Rows=1, Packaging=Bulk, Series=XH, Termination=Press-Fit, Weight=0.0625lb, Width=0.5inch
J8: library part PPTC061LFBN-RC, "Female, 6 C, Straight, .100\"CC; 3.20mm Tail, No Mt. 100u\" Tin; PBT, Phos Bronze, 105 C", Manufacturer=Sullins, Supplier Part Number 1=S7004-ND, Category=Connectors, ComponentLink1Description=https://media.digikey.com/pdf/Data%20Sheets/Sullins%20PDFs/Female_Headers.100_DS.pdf?src-supplier=Digi-Key, ComponentLink1URL=https://media.digikey.com/pdf/Data%20Sheets/Sullins%20PDFs/Female_Headers.100_DS.pdf?src-supplier=Digi-Key, ComponentLink2Description=http://www.sullinscorp.com/catalogs/78_Page80-81_HEADER_.100_2.54mm_FEMALE.pdf?src-supplier=Future+Electronics, ComponentLink2URL=http://www.sullinscorp.com/catalogs/78_Page80-81_HEADER_.100_2.54mm_FEMALE.pdf?src-supplier=Future+Electronics, Manufacturer Part Number=PPTC061LFBN-RC, Pricing 1="1=0.52000, 10=0.44900, 80=0.37050, 440=0.32220, 1000=0.26582, 5000=0.23360, 10000=0.23270 (USD)", RoHS=Yes, Stock 1=62927, Supplier 1=Digi-Key
K1 K2 K3 K4: "Power Relay 5VDC 15A SPST-NO(19mm 15.5mm 15.8mm) THT", Manufacturer="CUI Devices", Supplier Part Number 1=2223-PR12-5V-360-1A-ND, Category="Power Relays", Manufacturer Part Number=PR12-5V-360-1A, Pricing 1="1=1.03000, 10=0.96900, 25=0.86080, 50=0.81800, 100=0.77490, 250=0.68880, 500=0.64576, 1000=0.60270, 5000=0.58118 (USD)", RoHS=No, Stock 1=985, Supplier 1=Digi-Key
L1: library part L1210R2R2MDWIT, "Inductor RF Chip Wirewound 2.2uH 20% 100KHz 1.13A 0.104Ohm DCR 1210 T/R", Case Code (Imperial)=1210, Case Code (Metric)=3225, Current Rating=2A, DC Current=1.13A, DC Resistance (DCR)=80mR, Inductance=2.2uH, Inductance Tolerance=20%, Manufacturer=KEMET, Max Operating Temperature=105°C, Min Operating Temperature=-40°C, Package Quantity=1000, Resistor Type=Wirewound,Ceramic, Self Resonant Frequency=190MHz, Supplier Part Number 1=3638976, Test Frequency=100kHz, Case/Package=1210, Category="Fixed Inductors", ComponentLink1Description=https://datasheet.ciiva.com/4957/f3115-4957838.pdf?src-supplier=Mouser, ComponentLink1URL=https://datasheet.ciiva.com/4957/f3115-4957838.pdf?src-supplier=Mouser, ComponentLink2Description=https://datasheet.ciiva.com/6691/f3115-6691487.pdf?src-supplier=Digi-Key, ComponentLink2URL=https://datasheet.ciiva.com/6691/f3115-6691487.pdf?src-supplier=Digi-Key, ComponentLink3Description=https://datasheet.ciiva.com/8512/f3115-8512543.pdf?src-supplier=Avnet, ComponentLink3URL=https://datasheet.ciiva.com/8512/f3115-8512543.pdf?src-supplier=Avnet, ComponentLink4Description=https://datasheet.ciiva.com/22685/27262-22685038.pdf?src-supplier=Element14, ComponentLink4URL=https://datasheet.ciiva.com/22685/27262-22685038.pdf?src-supplier=Element14, Core Material=Ferrite, Depth=2.7mm, Height=2.5mm, Height - Seated (Max)=0.106inch, Length=3.2mm, Manufacturer Part Number=L1210R2R2MDWIT, Max DC Current=2A, Military Standard=Not, Mount="Surface Mount", Packaging="Tape and Reel", Pricing 1="1=0.29100, 50=0.27000, 100=0.24900, 250=0.23600, 500=0.22300, 1000=0.16900, 5000=0.16400, 10000=0.15800 (GBP)", Radiation Hardening=No, Reach SVHC Compliant=Yes, RoHS=Yes, RoHS Compliant=Yes, Series=L-DWI, Shielding=Unshielded, Stock 1=12, Supplier 1=Farnell, Termination=SMD/SMT, Tolerance=20%, Width=2.5mm
L2: library part SRR4828A-3R9Y, "Inductor Power Shielded Wirewound 3.9uH 30% 100KHz Ferrite 3.4A 0.047Ohm DCR Automotive T/R", Case/Package=Nonstandard, Current Rating=1.8A, DC Resistance (DCR)=145mR, Manufacturer=Bourns, Max Operating Temperature=150°C, Min Operating Temperature=-40°C, Ratings=AEC-Q200, Resistor Type=Wirewound, Saturation Current=920mA, Self Resonant Frequency=25MHz, Supplier Part Number 1=SRR4828A-3R9YCT-ND, Test Frequency=100kHz, Tolerance=20%, Category="Fixed Inductors", ComponentLink1Description=http://www.farnell.com/datasheets/2339105.pdf?src-supplier=Farnell, ComponentLink1URL=http://www.farnell.com/datasheets/2339105.pdf?src-supplier=Farnell, ComponentLink2Description=https://www.bourns.com/docs/Product-Datasheets/SRR4828A.pdf?src-supplier=Digi-Key, ComponentLink2URL=https://www.bourns.com/docs/Product-Datasheets/SRR4828A.pdf?src-supplier=Digi-Key, Core Material=Ferrite, Manufacturer Part Number=SRR4828A-3R9Y, Mounting Technology="Surface Mount", Packaging="Cut Tape", Pricing 1="1=1.02000, 10=0.89600, 25=0.83240, 50=0.70420, 100=0.64020, 250=0.60184 (USD)", RoHS=Yes, RoHS Compliant=Yes, Shielding=Shielded, Stock 1=859, Supplier 1=Digi-Key
L3: library part SRR4828A-4R7Y, "Inductor Power Shielded Wirewound 4.7uH 30% 100KHz Ferrite 3A 0.054Ohm DCR Automotive T/R", Case/Package=Nonstandard, Current Rating=3A, DC Resistance (DCR)=54mR, Manufacturer=Bourns, Max Operating Temperature=150°C, Min Operating Temperature=-40°C, Ratings=AEC-Q200, Resistor Type=Wirewound, Saturation Current=1.6A, Self Resonant Frequency=50MHz, Supplier Part Number 1=SRR4828A-4R7YCT-ND, Test Frequency=100kHz, Tolerance=30%, Category="Fixed Inductors", ComponentLink1Description=https://www.bourns.com/docs/Product-Datasheets/SRR4828A.pdf?src-supplier=Digi-Key, ComponentLink1URL=https://www.bourns.com/docs/Product-Datasheets/SRR4828A.pdf?src-supplier=Digi-Key, Core Material=Ferrite, Manufacturer Part Number=SRR4828A-4R7Y, Mounting Technology="Surface Mount", Packaging="Cut Tape", Pricing 1="1=1.02000, 10=0.89600, 25=0.83240, 50=0.70420, 100=0.64020, 250=0.60184 (USD)", RoHS=Yes, RoHS Compliant=Yes, Shielding=Shielded, Stock 1=2297, Supplier 1=Digi-Key
L4: library part TFM322512ALMA6R8MTAA, "Inductor Power Shielded Thin Film 6.8uH 20% 1MHz Metal 1.4A 0.26Ohm DCR 1210 Automotive T/R", Manufacturer=TDK, Supplier Part Number 1=445-TFM322512ALMA6R8MTAACT-ND, Category="Fixed Inductors", Manufacturer Part Number=TFM322512ALMA6R8MTAA, Pricing 1="1=0.97000, 10=0.90300, 25=0.83360, 50=0.69460, 100=0.65290, 250=0.58348, 500=0.50014, 1000=0.44456 (USD)", RoHS=Yes, Stock 1=3686, Supplier 1=Digi-Key
MH1 MH2: "Mounting Hole 7.4mm Diameter, 3.2mm Drill"
MH3 MH4: "Mounting Hole Non Copper 7.4mm Diameter, 3.2mm Drill NPTH"
Q1 Q2 Q3 Q4 Q5: library part CMP-2000-04931-2, "TRANS NPN 40V 0.2A SMD SOT23-3", Case/Package=SOT-23, Collector Base Voltage (VCBO)=60V, Collector Emitter Breakdown Voltage=40V, Collector Emitter Saturation Voltage=300mV, Continuous Collector Current=200mA, Emitter Base Voltage (VEBO)=6V, Frequency=300MHz, Max Operating Temperature=150°C, Max Power Dissipation=300mW, Min Operating Temperature=-55°C, Package Quantity=3000, Power Dissipation=350mW, Collector Emitter Voltage (VCEO)=40V, Contact Plating=Tin, Element Configuration=Single, Gain Bandwidth Product=300MHz, Height=1mm, hFE Min=100, Lead Free="Lead Free", Length=3.05mm, Max Breakdown Voltage=40V, Max Collector Current=200mA, Max Frequency=300MHz, Mount="Surface Mount", Number of Elements=1, Number of Pins=3, Packaging="Tape and Reel", Polarity=NPN, Radiation Hardening=No, REACH SVHC="No SVHC", Transition Frequency=300MHz, Voltage Rating (DC)=40V, Weight=0.000282oz, Width=1.4mm
R1 R2 R3 R4 R5 R6 R7 R8: library part RNCF0805DTE120R, "Res Thin Film 0805 120 Ohm 0.5% 1/10W ±25ppm/°C Molded SMD SMD Paper T/R", Case/Package=0805, Manufacturer="Stackpole Electronics", Max Operating Temperature=155°C, Min Operating Temperature=-55°C, Resistor Type="Thin Film", Supplier Part Number 1=738-RNCF0805DTE120RCT-ND, Temperature Coefficient=25ppm/°C, Tolerance=0.5%, Category="Chip SMD Resistors", ComponentLink1Description=https://www.seielect.com/catalog/sei-rncf.pdf?src-supplier=Digi-Key, ComponentLink1URL=https://www.seielect.com/catalog/sei-rncf.pdf?src-supplier=Digi-Key, ComponentLink2Description=https://www.seielect.com/Catalog/SEI-rncf.pdf?src-supplier=Avnet, ComponentLink2URL=https://www.seielect.com/Catalog/SEI-rncf.pdf?src-supplier=Avnet, Contact Plating=Tin,Matte, Manufacturer Part Number=RNCF0805DTE120R, Mounting Technology="Surface Mount", Packaging="Tape and Reel", Pricing 1="1=0.14000, 10=0.11600, 100=0.04520, 1000=0.01890, 2500=0.01732 (USD)", Radiation Hardening=No, RoHS=Yes, Stock 1=3905, Supplier 1=Digi-Key
R9 R12 R13 R30 R31 R32 R33 R34 R35 R36 R37: library part RC0805FR-0710KL, "Res Thick Film 0805 10K Ohm 1% 0.125W(1/8W) +/-100ppm/C Epoxy Pad SMD T/R", Case Code (Imperial)=0805, Case Code (Metric)=2012, Manufacturer=Yageo, Max Operating Temperature=155°C, Max Power Dissipation=125mW, Min Operating Temperature=-55°C, Package Quantity=1, Resistance=10kR, Resistance Tolerance=1%, Resistor Type="Thick Film", Supplier Part Number 1=311-10.0KCRCT-ND, Temperature Coefficient=100ppm/°C, Voltage Rating=150V, Case/Package=0805, Category="Chip SMD Resistors", Construction=Rectangular, Depth=1.25mm, Features="Moisture Resistant", Height=0.024inch, Lead Free="Lead Free", Length=0.079inch, Manufacturer Part Number=RC0805FR-0710KL, Military Standard=Not, Number of Terminations=2, Packaging="Tape and Reel", Power Rating=125mW, Pricing 1="1=0.10000, 10=0.03700, 100=0.01490, 1000=0.00669, 2500=0.00581 (USD)", RoHS=Yes, RoHS Compliant=Yes, Series=RC, Size Code=0805, Stock 1=11681830, Supplier 1=Digi-Key, Technology="THICK FILM", Termination=SMD/SMT, Tolerance=1%, Width=0.049inch
R10 R11: library part RC0805FR-0722RL, "Res Thick Film 0805 22 Ohm 1% 0.125W(1/8W) ±100ppm/C Pad SMD T/R", Case Code (Imperial)=0805, Case Code (Metric)=2012, Manufacturer=Yageo, Max Operating Temperature=155°C, Max Power Dissipation=125mW, Min Operating Temperature=-55°C, Package Quantity=1, Resistance Tolerance=1%, Resistor Type="Thick Film", Supplier Part Number 1=311-22.0CRDKR-ND, Temperature Coefficient=100ppm/°C, Voltage Rating=150V, Case/Package=0805, Category="Chip SMD Resistors", ComponentLink1Description=https://datasheet.ciiva.com/11819/0900766b8106beab-11819837.pdf?src-supplier=RSComponents, ComponentLink1URL=https://datasheet.ciiva.com/11819/0900766b8106beab-11819837.pdf?src-supplier=RSComponents, ComponentLink2Description=https://datasheet.ciiva.com/46447/444164-46447574.pdf?src-supplier=Element14, ComponentLink2URL=https://datasheet.ciiva.com/46447/444164-46447574.pdf?src-supplier=Element14, ComponentLink3Description=https://datasheet.ciiva.com/2457/pyu-r-int-thick-7-2457045.pdf?src-supplier=Digi-Key, ComponentLink3URL=https://datasheet.ciiva.com/2457/pyu-r-int-thick-7-2457045.pdf?src-supplier=Digi-Key, ComponentLink4Description=https://datasheet.ciiva.com/2457/pyu-r-int-thick-7-2457046.pdf?src-supplier=Digi-Key, ComponentLink4URL=https://datasheet.ciiva.com/2457/pyu-r-int-thick-7-2457046.pdf?src-supplier=Digi-Key, ComponentLink5Description=https://datasheet.ciiva.com/2457/pyu-r-int-thick-7-2457044.pdf?src-supplier=Digi-Key, ComponentLink5URL=https://datasheet.ciiva.com/2457/pyu-r-int-thick-7-2457044.pdf?src-supplier=Digi-Key, ComponentLink6Description=https://datasheet.ciiva.com/12667/rc0805-12667371.pdf?src-supplier=Mouser, ComponentLink6URL=https://datasheet.ciiva.com/12667/rc0805-12667371.pdf?src-supplier=Mouser, Construction=Rectangular, Depth=1.25mm, Features="Moisture Resistant", Height=0.024inch, Lead Free="Lead Free", Length=0.079inch, Manufacturer Part Number=RC0805FR-0722RL, Military Standard=Not, Number of Terminations=2, Packaging="Tape and Reel", Power Rating=125mW, Pricing 1="1=0.10000, 10=0.03600, 100=0.01480, 1000=0.00666, 2500=0.00578 (USD)", Resistance=22R, RoHS=Yes, RoHS Compliant=Yes, Series=RC, Stock 1=326034, Supplier 1=Digi-Key, Technology="THICK FILM", Termination=SMD/SMT, Tolerance=1%, Width=0.049inch, Working Voltage=150V
R14 R15 R16 R17 R18 R19 R20 R21 R26: library part RNCP0805FTD1K00, "Res Thin Film 0805 1K Ohm 1% 0.25W(1/4W) ±100ppm/C Sulfur Resistant Pad SMD T/R", Case Code (Imperial)=0805, Case Code (Metric)=2012, Manufacturer="Stackpole Electronics", Max Operating Temperature=155°C, Max Power Dissipation=250mW, Min Operating Temperature=-55°C, Resistance=1kR, Resistor Type="Thin Film", Supplier Part Number 1=RNCP0805FTD1K00CT-ND, Temperature Coefficient=100ppm/°C, Tolerance=1%, Case/Package=0805, Category="Chip SMD Resistors", ComponentLink1Description=http://www.seielect.com/Catalog/SEI-rncp.pdf?src-supplier=Future+Electronics, ComponentLink1URL=http://www.seielect.com/Catalog/SEI-rncp.pdf?src-supplier=Future+Electronics, ComponentLink2Description=https://www.seielect.com/Catalog/SEI-rncp.pdf?src-supplier=Digi-Key, ComponentLink2URL=https://www.seielect.com/Catalog/SEI-rncp.pdf?src-supplier=Digi-Key, ComponentLink3Description=https://www.seielect.com/catalog/SEI-Packaging.pdf?src-supplier=Digi-Key, ComponentLink3URL=https://www.seielect.com/catalog/SEI-Packaging.pdf?src-supplier=Digi-Key, Features="Moisture Resistant,Anti-Sulfur", Height=0.024inch, Lead Free="Lead Free", Length=0.079inch, Manufacturer Part Number=RNCP0805FTD1K00, Mount="Surface Mount", Number of Terminations=2, Packaging="Tape and Reel", Power Rating=250mW, Pricing 1="1=0.10000, 10=0.07300, 100=0.02970, 1000=0.01336, 2500=0.01159 (USD)", RoHS=Yes, RoHS Compliant=Yes, Series=RNCP, Size Code=0805, Stock 1=359931, Supplier 1=Digi-Key, Width=0.049inch
R22 R23 R24 R25 R27: library part RC0805JR-13220RL, "Res Thick Film 0805 220 Ohm 5% 0.125W(1/8W) ±100ppm/C Pad SMD T/R", Case Code (Imperial)=0805, Case Code (Metric)=2012, Manufacturer=Yageo, Max Operating Temperature=155°C, Min Operating Temperature=-55°C, Power Rating=125mW, Resistance=220R, Resistor Type="Thick Film", Supplier Part Number 1=13-RC0805JR-13220RLCT-ND, Temperature Coefficient=100ppm/°C, Tolerance=5%, Voltage Rating=150V, Case/Package=0805, Category="Chip SMD Resistors", ComponentLink1Description=http://www.mouser.com/ds/2/447/Yageo_08112016_RC0805-968729.pdf?src-supplier=Mouser, ComponentLink1URL=http://www.mouser.com/ds/2/447/Yageo_08112016_RC0805-968729.pdf?src-supplier=Mouser, Construction=Rectangular, Contact Plating=Tin,Matte, Depth=1.25mm, Height=0.5mm, Length=2mm, Manufacturer Part Number=RC0805JR-13220RL, Military Standard=Not, Packaging="Tape and Reel", Pricing 1="1=0.10000, 10=0.03100, 100=0.01280, 1000=0.00573, 2500=0.00497, 5000=0.00411 (USD)", Radiation Hardening=No, RoHS=Yes, RoHS Compliant=Yes, Series=RC, Stock 1=20198, Supplier 1=Digi-Key, Termination=SMD/SMT, Width=1.25mm
R28 R29 R38 R39 R40 R41 R42: library part RC0805FR-07560RL, "Res General Purpose Thick Film 0805 560 Ohm 1% 1/8W ±100ppm/°C Molded Paper T/R", Case Code (Imperial)=0805, Case Code (Metric)=2012, Manufacturer=Yageo, Max Operating Temperature=155°C, Max Power Dissipation=125mW, Min Operating Temperature=-55°C, Package Quantity=1, Resistance Tolerance=1%, Resistor Type="Thick Film", Supplier Part Number 1=311-560CRCT-ND, Temperature Coefficient=100ppm/°C, Voltage Rating=150V, Case/Package=0805, Category="Chip SMD Resistors", Construction=Rectangular, Depth=1.25mm, Features="Moisture Resistant", Height=0.024inch, Lead Free="Lead Free", Length=0.079inch, Manufacturer Part Number=RC0805FR-07560RL, Military Standard=Not, Number of Terminations=2, Packaging="Cut Tape", Power Rating=125mW, Pricing 1="1=0.10000, 10=0.03600, 100=0.01480, 1000=0.00666, 2500=0.00578 (USD)", Resistance=560R, RoHS=Yes, RoHS Compliant=Yes, Series=RC, Size Code=0805, Stock 1=316002, Supplier 1=Digi-Key, Termination=SMD/SMT, Tolerance=1%, Weight=0.000194oz, Width=0.049inch
SW1 SW2: "Switch Tactile OFF (ON) SPST Round Button PC Pins 0.05A 24VDC 1.57N Thru-Hole Loose", Actuator Color=Black, Contact Current Rating=50mA, Contact Resistance=100mR, Manufacturer="TE Connectivity Alcoswitch", Max Operating Temperature=85°C, Max Voltage Rating (DC)=24V, Min Operating Temperature=-35°C, Operating Force=160gf, Package Quantity=750, Supplier Part Number 1=450-1650-ND, Actuator Length=0.055inch, Actuator Material=PBT, Actuator Type=Standard, Category="Pushbutton Switches", ComponentLink1Description=https://datasheet.ciiva.com/30199/1825910-6rqpn1825910-6-30199520.pdf?src-supplier=Onlinecomponents.com, ComponentLink1URL=https://datasheet.ciiva.com/30199/1825910-6rqpn1825910-6-30199520.pdf?src-supplier=Onlinecomponents.com, ComponentLink2Description=https://datasheet.ciiva.com/15184/getdatasheetpartid-395915-15184509.pdf?src-supplier=Verical, ComponentLink2URL=https://datasheet.ciiva.com/15184/getdatasheetpartid-395915-15184509.pdf?src-supplier=Verical, Contact Material="Copper Alloy", Contact Plating=Silver, Electrical Life=100000Cycles, ELV=Compliant, Illumination Type=Non-Illuminated,Illuminated, Lead Free="Lead Free", Length=5.99mm, Manufacturer Part Number=1825910-6, Max Current Rating=50mA, Mechanical Life=100000Cycles, Mount="Through Hole", Orientation=Straight, Packaging="Loose Piece", Pricing 1="1=0.13000, 10=0.12500, 25=0.11840, 100=0.10780, 250=0.10132, 750=0.09268, 1500=0.07759, 3000=0.07544, 5250=0.07113 (USD)", RoHS=Yes, RoHS Compliant=Yes, Series=FSMJ, Stock 1=112137, Supplier 1=Digi-Key, Switch Function=Off-Mom, Switch Travel=0.25mm, Termination="PC Pins", Throw Configuration=SPST, Type=Switch
U1 U2 U3 U4: library part CMP-2000-05204-1, "Photocoupler - Phototransistor Output, 35 V VCEO, -50 to 110 degC, 4-Pin SMD, RoHS, Tape and Reel", Collector Current (DC)=0.05A, Collector-Emitter Saturation Voltage=0.2V, Collector-Emitter Voltage=35V, Current Transfer Ratio=600%, Forward Current=50mA, Forward Voltage=1.4V, Isolation Voltage=5000V, Manufacturer=Lite-On, Operating Temp Range=-30Cto100C, Operating Temperature Classification=Commercial, Package Type=PDIPSMD, Power Dissipation=0.2W, Reverse Breakdown Voltage=6V, Collector Current (DC) (Max)=0.05A, Datasheet URL=https://datasheet.ciiva.com/15118/getdatasheetpartid-147501-15118828.pdf, Datasheet Version=Jan-10, DELETED=Compliant, Fall Time=18000ns, Input Type=DC, Manufacturer URL=http://www.us.liteon.com/, Mounting=SurfaceMount, Number of Elements=1, Output Device=Transistor, Output Type=DC, Pin Count=4, Rad Hardened=No, Rise Time=18000ns
U5: "Rx Txrx Mod Wifi Trace Ant SMD", Manufacturer="Espressif Systems", Supplier Part Number 1=1965-ESP32-WROOM-32E-H4CT-ND, Category=Uncategorized, Manufacturer Part Number=ESP32-WROOM-32E-H4, Pricing 1="1=3.15000 (USD)", RoHS=No, Stock 1=12159, Supplier 1=Digi-Key
U6: "AP63203 Series 3.3 V 2 A SMT Fixed Low IQ Synchronous Buck - TSOT-26", Manufacturer=Diodes, Supplier Part Number 1=AP63203WU-7DICT-ND, Category="Voltage Regulators - Switching", Manufacturer Part Number=AP63203WU-7, Pricing 1="1=0.91000, 10=0.79900, 25=0.75040, 100=0.61250, 250=0.56896, 500=0.48420, 1000=0.38737 (USD)", RoHS=Yes, Stock 1=45437, Supplier 1=Digi-Key
U7: "AP63205 Series 32 V 2 A 1.1 MHz Synchronous Buck Converter -TSOT-26", Manufacturer=Diodes, Supplier Part Number 1=AP63205WU-7DIDKR-ND, Category="Voltage Regulators - Switching", Manufacturer Part Number=AP63205WU-7, Pricing 1="1=0.91000, 10=0.79900, 25=0.75040, 100=0.61250, 250=0.56896, 500=0.48420, 1000=0.38737 (USD)", RoHS=Yes, Stock 1=147466, Supplier 1=Digi-Key